# Altium PCB iot_hdmi_mux.PcbDoc
Units mm, origin at the board's own origin, x right, y up, seen from the top; angles counter-clockwise.
Board outline 40 x 50 mm, 4 copper layers (Top Layer, Layer 1, Layer 2, Bottom Layer), stack 1.57 mm thick; 48 components, 62 nets, 245 pads, 284 vias.
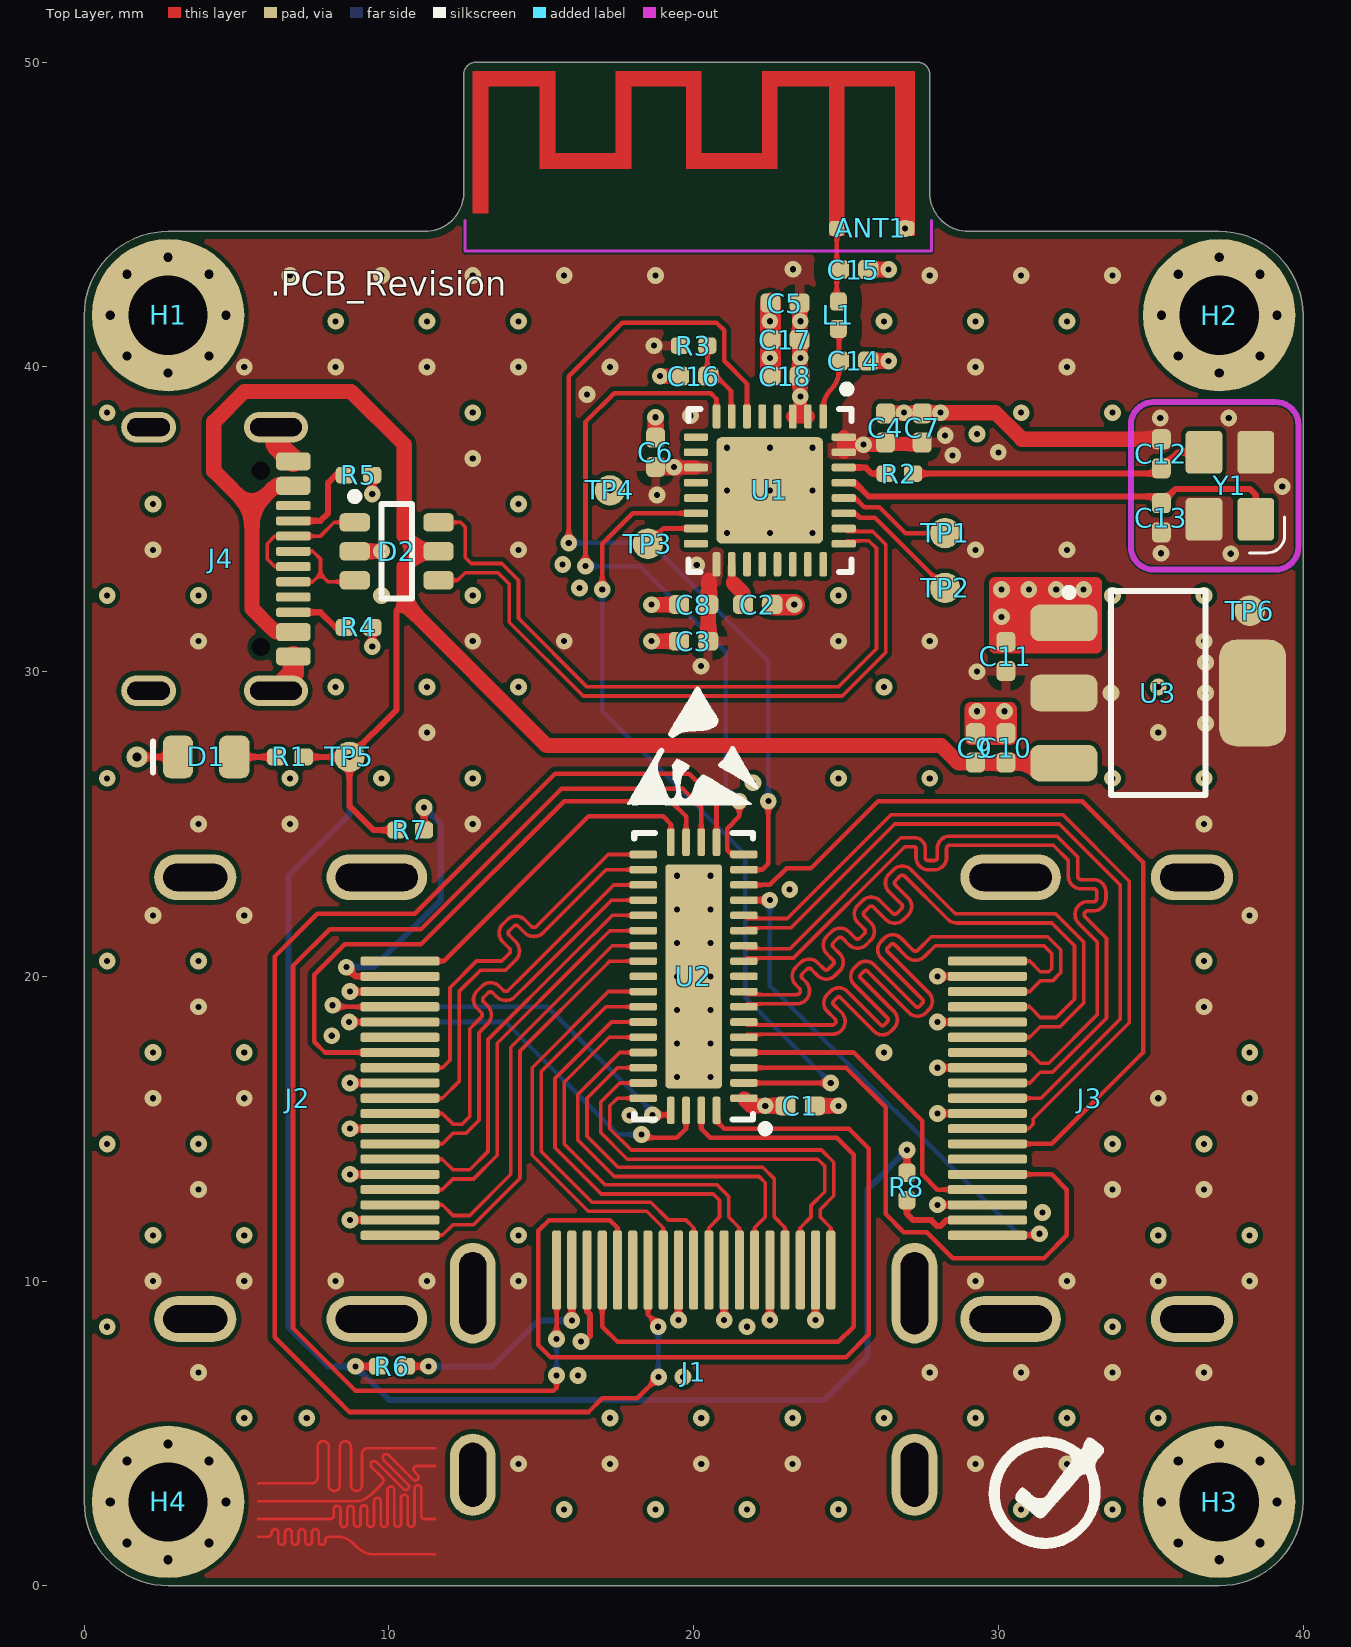
[diagram p0: Top Layer view]
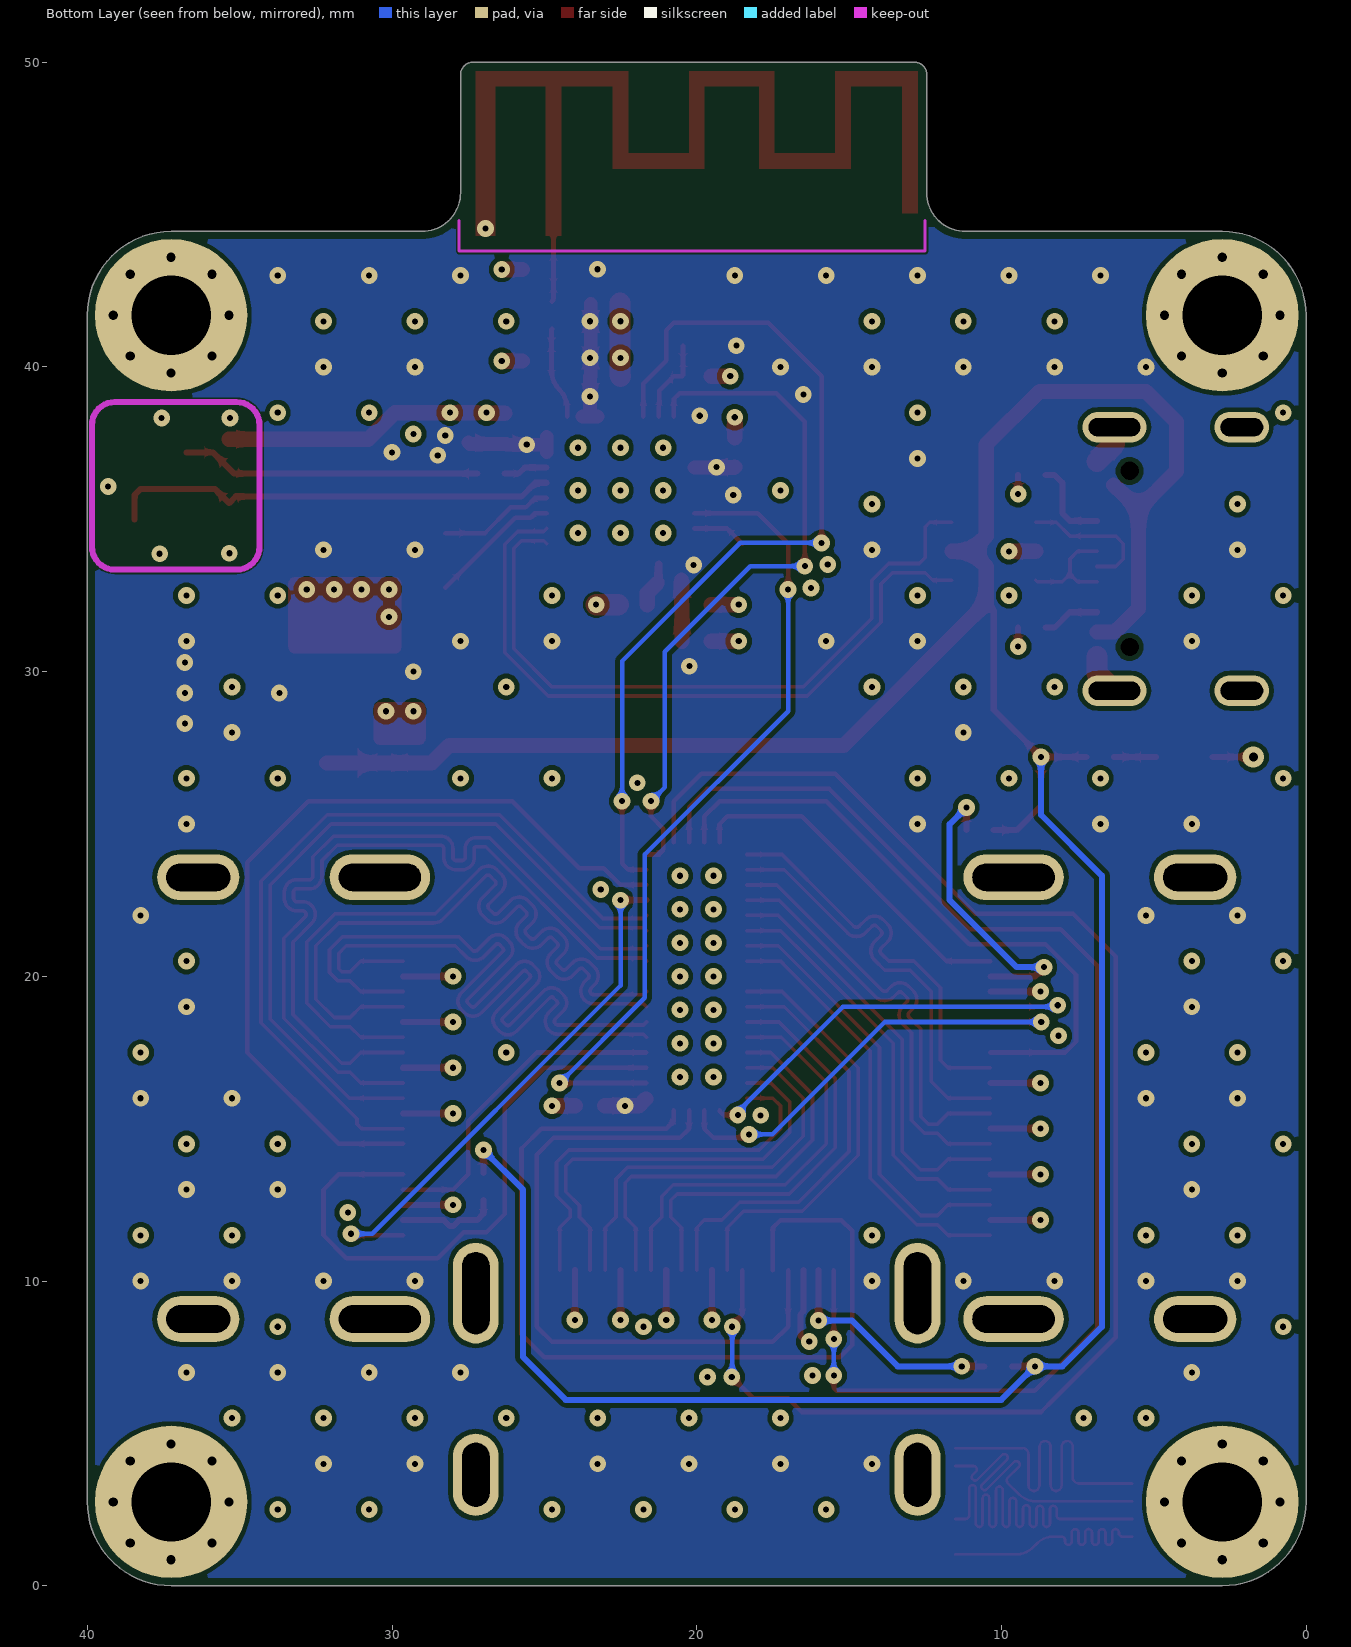
[diagram p1: Bottom Layer view, seen from below]
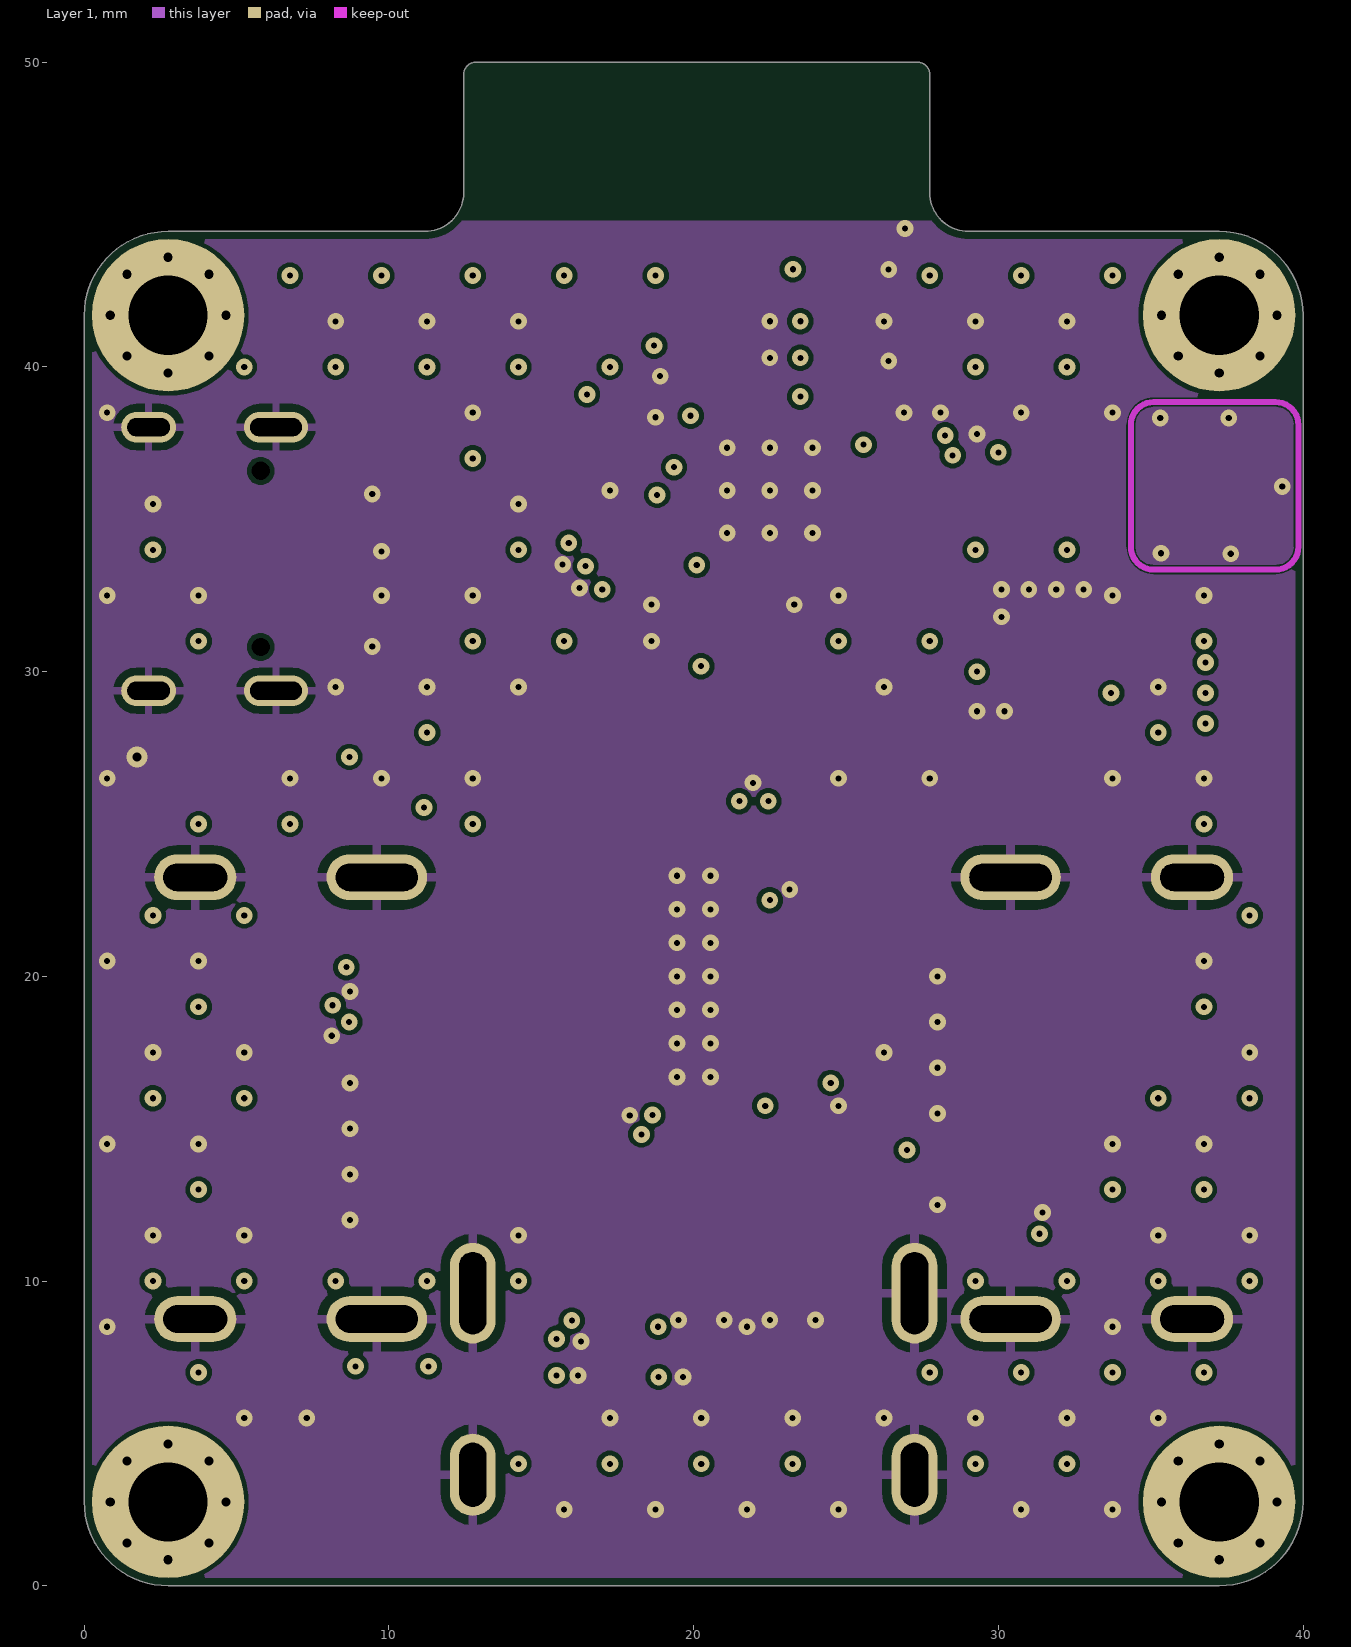
[diagram p2: Layer 1]
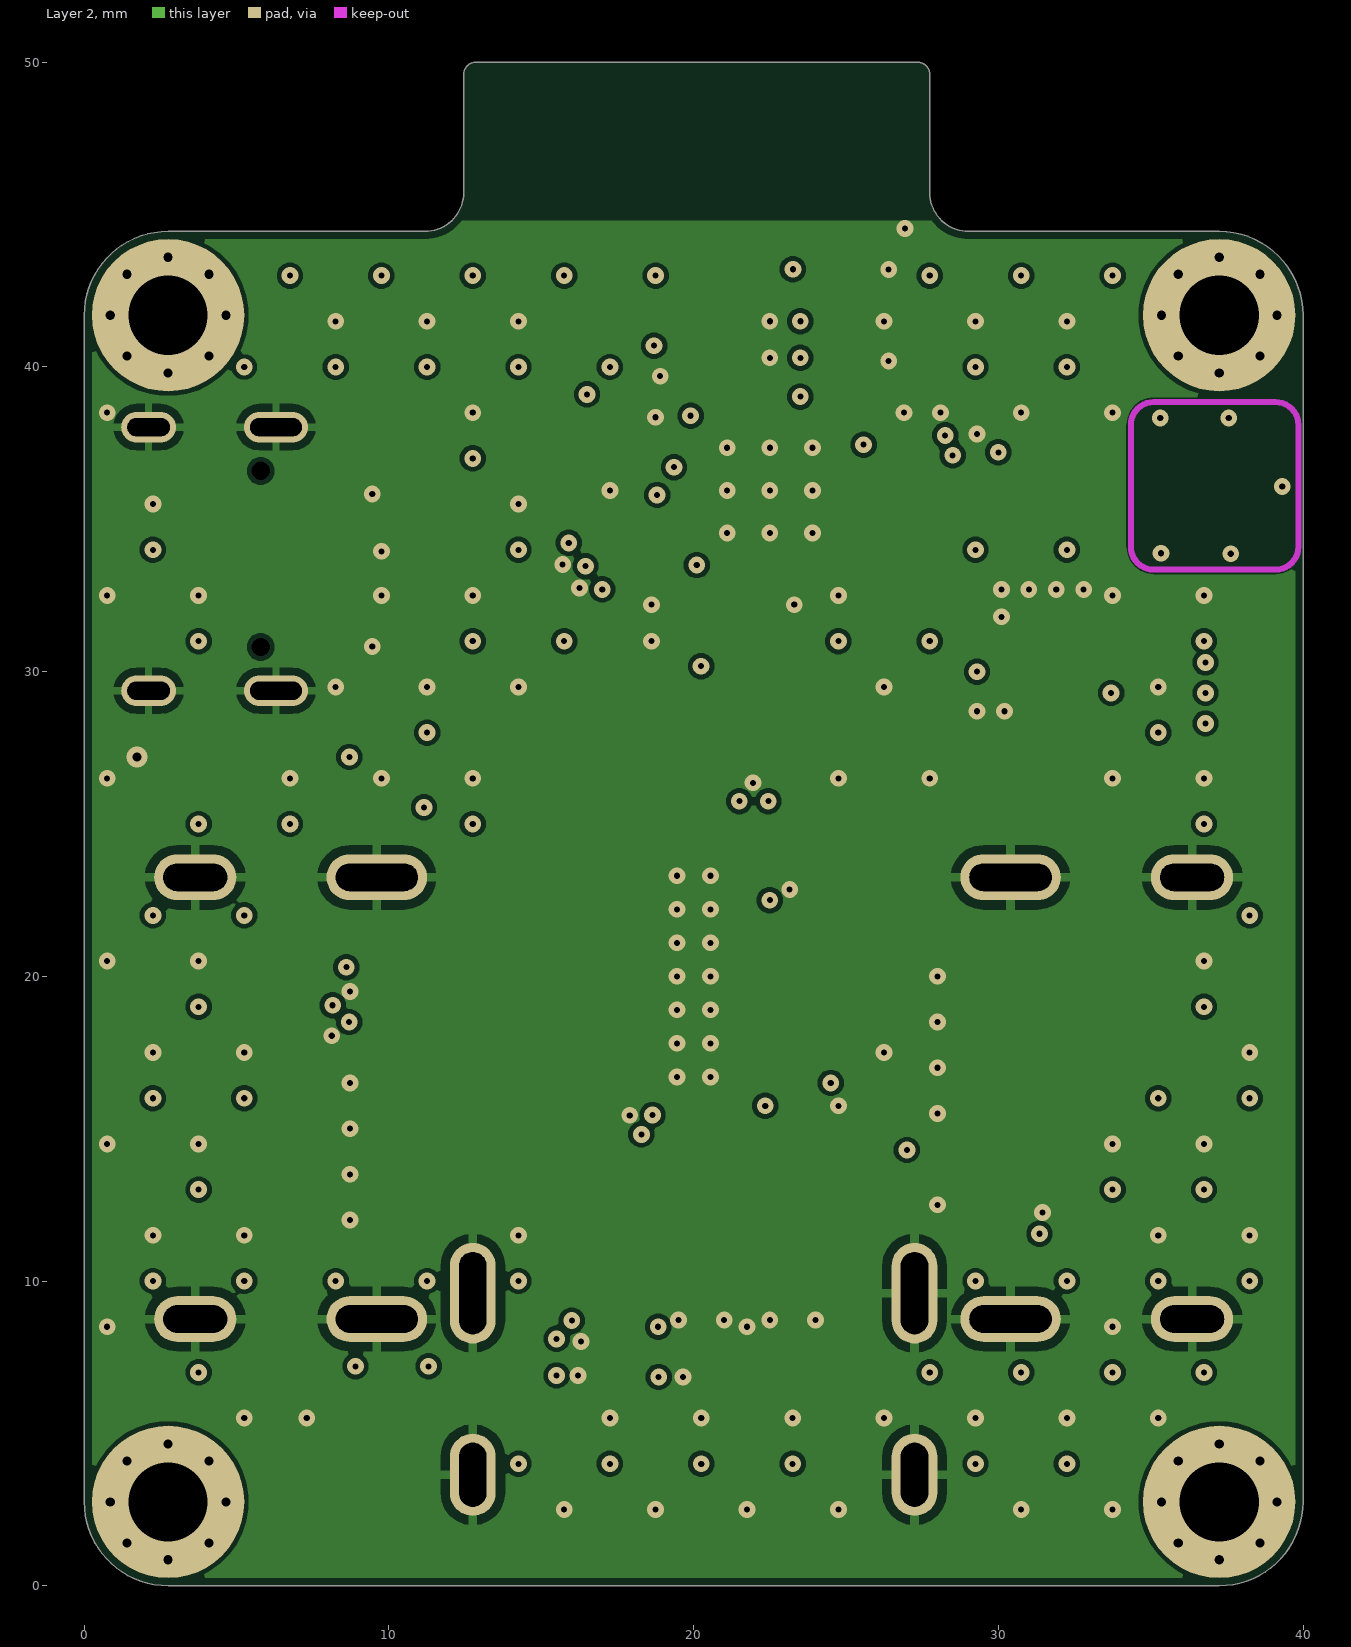
[diagram p3: Layer 2]
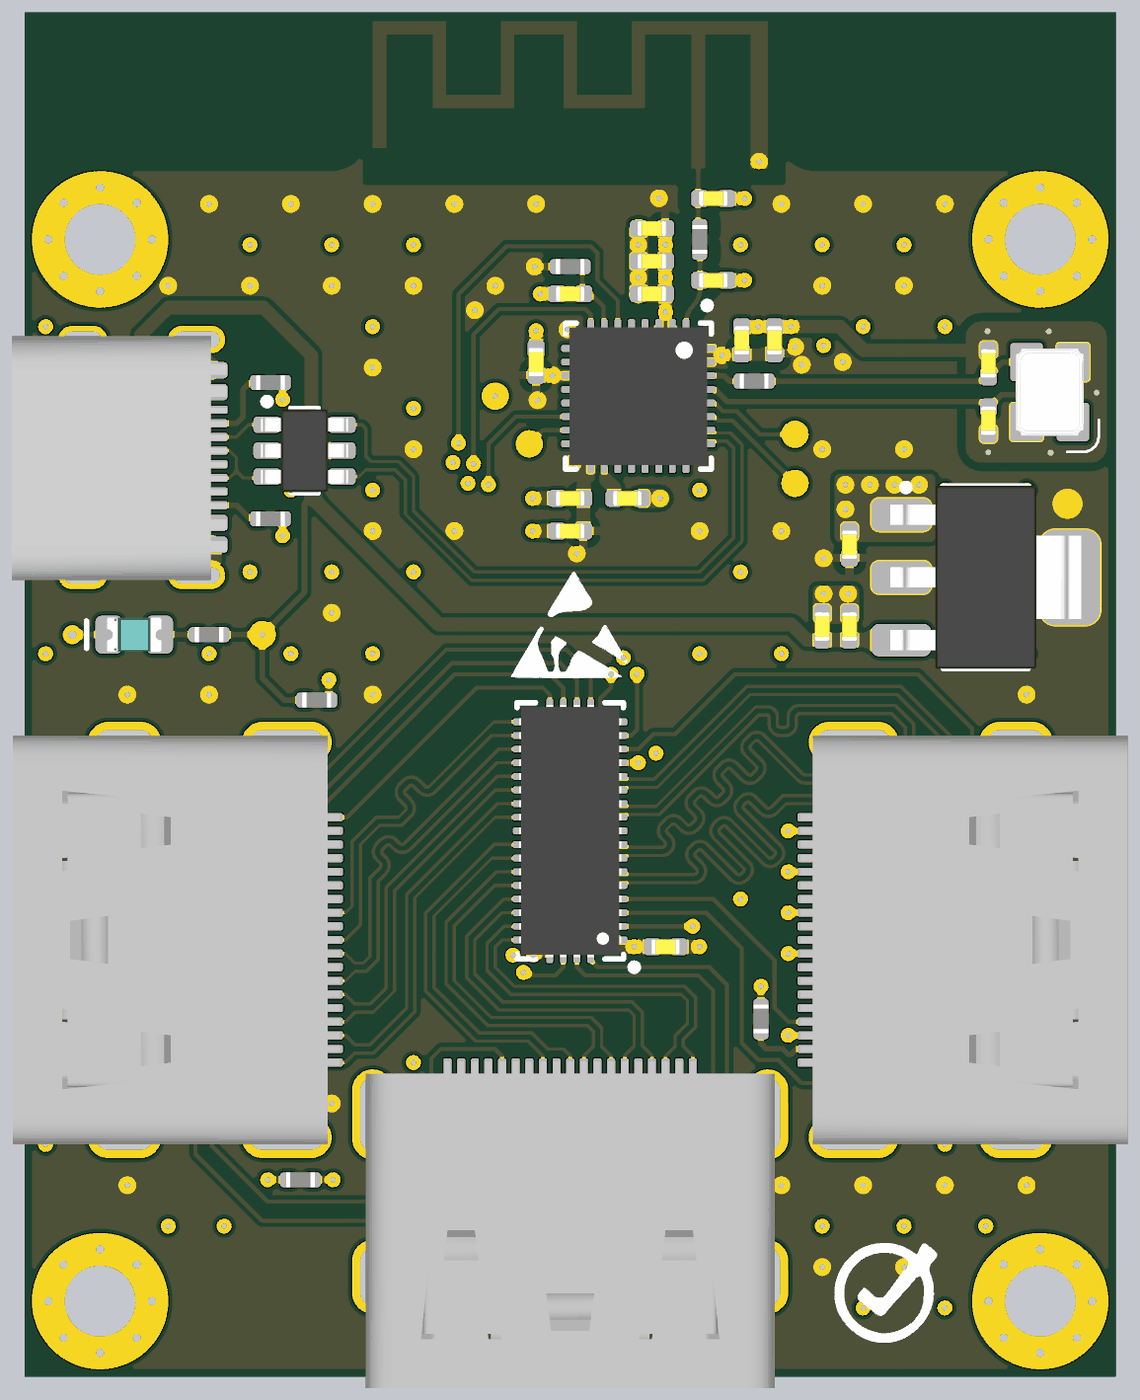
[diagram p4: 3D render of the assembled board from above, using the file's embedded part models]

## Layer stack, top to bottom
Top Solder: solder mask 0.0102, Solder Resist, Dk 3.5
Top Layer: signal copper 0.0356
Dielectric 2: prepreg 0.0994, PP-006, Dk 4.1
Layer 1: signal copper 0.0175
Dielectric 1: dielectric 1.265, FR-4, Dk 4.8
Layer 2: signal copper 0.0175
Dielectric 3: prepreg 0.0994, PP-006, Dk 4.1
Bottom Layer: signal copper 0.0356
Bottom Solder: solder mask 0.0102, Solder Resist, Dk 3.5

## Board outline
0,2.75 ccw(c2.75,2.75) 2.75,0 37.25,0 ccw(c37.25,2.75) 40,2.75 40,41.7 ccw(c37.25,41.7) 37.25,44.45 29.02,44.45 cw(c29.02,45.72) 27.75,45.72 27.75,49.6 ccw(c27.35,49.6) 27.35,50 12.85,50 ccw(c12.85,49.6) 12.45,49.6 12.45,45.72 cw(c11.18,45.72) 11.18,44.45 2.75,44.45 ccw(c2.75,41.7) 0,41.7

## Design rules (kind name [scope] priority, off if disabled: settings)
BoardOutlineClearance [All] p1: gap=0.25 ignorepadtopadclearanceinfootprint=FALSE
Clearance Clearance_2 [IsKeepOut vs IsRegion] p1: gap=0.05 ignorepadtopadclearanceinfootprint=FALSE
Clearance Clearance_1 [InNetClass('RF') vs InPolygon] p2: gap=0.5 ignorepadtopadclearanceinfootprint=FALSE
Clearance [All] p3: gap=0.15 ignorepadtopadclearanceinfootprint=FALSE
DiffPairsRouting [All] p1: maxlimit=0.254 minlimit=0.181 mostfreqgap=0.254 toplayer_maxgap=0.181 toplayer_prefgap=0.181 toplayer_minwidth=0.12 toplayer_maxwidth=0.12 toplayer_prefwidth=0.12 bottomlayer_maxgap=0.181 bottomlayer_prefgap=0.181 bottomlayer_minwidth=0.12 bottomlayer_maxwidth=0.12 bottomlayer_prefwidth=0.12 impedanceprofiledriven=TRUE impedanceprofileid={FBAB892D-14A3-4661-8250-639540554748} impedanceprofilevalue=100.000000 maxuncoupledlength=12.7
HoleSize [All] p1: absolutevalues=TRUE maxlimit=10 minlimit=0.2 maxpercent=80.000 minpercent=20.000
MatchedLengths MatchedLengths_A [InNetClass('HDMI_A')] p1: tolerance=2.5 checknetsindiffpair=FALSE checkdiffpairvsdiffpair=TRUE checkxsignals=TRUE checkothers=TRUE
MatchedLengths MatchedLengths_B [InNetClass('HDMI_B')] p2: tolerance=2.5 checknetsindiffpair=FALSE checkdiffpairvsdiffpair=TRUE checkxsignals=TRUE checkothers=TRUE
MatchedLengths MatchedLengths_C [InNetClass('HDMI_C')] p3: tolerance=2.5 checknetsindiffpair=FALSE checkdiffpairvsdiffpair=TRUE checkxsignals=TRUE checkothers=TRUE
MinimumSolderMaskSliver [All] p1: minsoldermaskwidth=0.1
PolygonConnect PolygonConnect_1 [HasFootprint('C0402') or HasFootprint('C0603') or HasFootprint('R*') or IsThruPin] p1: connectstyle=Relief reliefconductorwidth=0.3 reliefentries=4 polygonreliefangle="90 Angle" airgapwidth=0.3
PolygonConnect [All] p2: connectstyle=Direct reliefconductorwidth=0.254 reliefentries=4 polygonreliefangle="90 Angle" airgapwidth=0.254
RoutingVias [All] p1: holewidth=0.3 width=0.7 viastyle="Through Hole" minholewidth=0.2 minwidth=0.55 maxholewidth=0.3 maxwidth=0.7
SilkToSilkClearance [All] p1: silktosilkclearance=0
SilkToSolderMaskClearance [IsPad] p1: minsilkscreentomaskgap=0.15 clearancetoexposedcopper=TRUE
SolderMaskExpansion SolderMaskExpansion_1 [IsVia] p1: expansion=-0.175 istentingtop=FALSE
SolderMaskExpansion [All] p2: expansion=0.05 istentingtop=FALSE
SupplyNets "Schematic Supply Nets_2" [InNet('GND')] p1: voltage=0.000
SupplyNets "Schematic Supply Nets_1" [InNet('+VBUS')] p2: voltage=0.000
SupplyNets "Schematic Supply Nets" [InNet('+3V3')] p3: voltage=0.000
UnRoutedNet [All] p1: checkbadconnections=TRUE
Width Width_RF [InNetClass('RF')] p1: maxlimit=0.254 minlimit=0.156 preferedwidth=0.254 toplayer_maxwidth=0.17 toplayer_prefwidth=0.17 bottomlayer_maxwidth=0.17 bottomlayer_prefwidth=0.17 impedanceprofiledriven=TRUE impedanceprofileid={8DBEE318-DAAD-4E52-B127-68809F1654DC} impedanceprofilevalue=50.000000 minimp=50.000000 maximp=50.000000 favimp=50.000000
Width [All] p2: maxlimit=1 minlimit=0.12 preferedwidth=0.2
24 further rules are at their usual default settings.

## Classes and differential pairs
net class USB: USB_D_N USB_D_P
net class HDMI_C: CCK_n CCK_p CD0_n CD0_p CD1_n CD1_p CD2_n CD2_p
net class HDMI_B: BCK_n BCK_p BD0_n BD0_p BD1_n BD1_p BD2_n BD2_p
net class HDMI_A: ACK_n ACK_p AD0_n AD0_p AD1_n AD1_p AD2_n AD2_p
net class RF: ANT MCU_ANT
differential pair USB_D: +USB_D_P -USB_D_N
differential pair CD2: +CD2_p -CD2_n
differential pair CD1: +CD1_p -CD1_n
differential pair CD0: +CD0_p -CD0_n
differential pair CCK: +CCK_p -CCK_n
differential pair BD2: +BD2_p -BD2_n
differential pair BD1: +BD1_p -BD1_n
differential pair BD0: +BD0_p -BD0_n
differential pair BCK: +BCK_p -BCK_n
differential pair AD2: +AD2_p -AD2_n
differential pair AD1: +AD1_p -AD1_n
differential pair AD0: +AD0_p -AD0_n
differential pair ACK: +ACK_p -ACK_n

## Components (designator, comment, footprint, x,y, rotation, side; value= is the part's Value field where it differs from the comment)
ANT1 "2.4GHz" ANT_2.4_2 27.75,44.8 r180 top net-tie
C1 "100n" C0402 23.5,15.75 r180 top
C2 "1u" C0402 22.1,32.2 r0 top
C3 "1u" C0402 20,31 r0 top
C4 "10n" C0402 26.3,38 r90 top
C5 "10u" C0402 23,42.1 r0 top
C6 "100n" C0402 18.75,37.2 r90 top
C7 "1u" C0402 27.5,38 r270 top
C8 "100n" C0402 20,32.2 r180 top
C9 "10u" C0402 29.25,27.5 r270 top
C10 "100n" C0402 30.25,27.5 r90 top
C11 "10u" C0402 30.25,30.5 r270 top
C12 "22p" C0402 35.35,37.15 r270 top
C13 "22p" C0402 35.35,35.05 r90 top
C14 "3p3" C0402 25.25,40.2 r0 top
C15 "3p3" C0402 25.25,43.2 r0 top
C16 "100n" C0402 20,39.7 r180 top
C17 "1u" C0402 23,40.9 r0 top
C18 "100n" C0402 23,39.7 r180 top
D1 "green" LED_0805_G 4,27.2 r0 top
D2 "USBLC6-2SC6" USBLC6-2SC6 10.25,33.95 r0 top
H1 "M2.5" M2.5_HOLE 2.75,41.7 r0 top
H2 "M2.5" M2.5_HOLE 37.25,41.7 r0 top
H3 "M2.5" M2.5_HOLE 37.25,2.75 r0 top
H4 "M2.5" M2.5_HOLE 2.75,2.75 r0 top
J1 "1747981-1" 1747981-1 20,7 r0 top locked
J2 "1747981-1" 1747981-1 7,16 r270 top locked
J3 "1747981-1" 1747981-1 33,16 r90 top locked
J4 "USB-C female" TYPE-C-31-M-12 0,33.7 r270 top locked
L1 "2n2" L0402 24.75,41.7 r90 top
R1 "5k1" R0402 6.75,27.2 r0 top
R2 "33R" R0402 26.75,36.5 r0 top
R3 "10k" R0402 20,40.7 r180 top
R4 "5k1" R0402 9,31.45 r180 top
R5 "5k1" R0402 9,36.45 r180 top
R6 "0R" R0402 10.1,7.2 r0 top
R7 "0R" R0402 10.7,24.8 r0 top
R8 "0R" R0402 27,13.1 r270 top
TP1 "Testing_Point_1mm" TestingPoint_1mm 28.25,34.55 r0 top
TP2 "Testing_Point_1mm" TestingPoint_1mm 28.25,32.75 r0 top
TP3 "Testing_Point_1mm" TestingPoint_1mm 18.5,34.2 r0 top
TP4 "Testing_Point_1mm" TestingPoint_1mm 17.25,35.95 r0 top
TP5 "Testing_Point_1mm" TestingPoint_1mm 8.7,27.2 r90 top
TP6 "Testing_Point_1mm" TestingPoint_1mm 38.25,32 r90 top
U1 "ESP32-C3FH4" QFN50P500X500X90_HS-33N 22.5,35.95 r270 top
U2 "TS3DV642" QFN50P350X900X80_HS-43N 20,20 r180 top
U3 "AZ1117CH-3.3TRG1" AZ1117CH-3.3TRG1 35.25,29.3 r0 top
Y1 "40MHz" SMD3225-4P 37.6,36.1 r90 top

## Footprints (in the part's own frame and the unit in brackets; to place one, negate y for a bottom-side part, rotate by r counter-clockwise, add the part's x,y. Pads: shape width x height; smd on the part's side, far side on the other; paste and mask are expansions set on the pad)
1747981-1 [mm] "19P Female HDMI Horizontal attachment 500mA -25℃~+70℃ SMD D-Sub / VGA Connectors ROHS"
  rrect50% 0.3x2.6 smd: 1(4.5,3.36) 2(4,3.36) 3(3.5,3.36) 4(3,3.36) 5(2.5,3.36) 6(2,3.36) 7(1.5,3.36) 8(1,3.36) 9(0.5,3.36) 10(0,3.36) 11(-0.5,3.36) 12(-1,3.36) 13(-1.5,3.36) 14(-2,3.36) 15(-2.5,3.36) 16(-3,3.36) 17(-3.5,3.36) 18(-4,3.36) 19(-4.5,3.36)
  oval 1.5x2.7 hole 0.9 slot 2.1 at 90 deg: M(-7.25,-3.36) M(7.25,-3.36)
  oval 1.5x3.3 hole 0.9 slot 2.7 at 90 deg: M(-7.25,2.6) M(7.25,2.6)
  body extent -7.5,-7.45 7.5,4.55, height 6.1
ANT_2.4_2 [mm] "SWRA117D 2.4GHz antenna design by TI"
  rrect50% 0.5x0.5 smd paste-2539.97 mask+0.102: 1(3.05,0.25)
  rrect50% 0.63x0.5 smd paste-2539.97 mask+0.102: 2(0.815,0.25)
  Top Layer region: 0.5,0.5 0.5,-4.91 5.5,-4.91 5.5,-2.21 7.5,-2.21 7.5,-4.91 10.3,-4.91 10.3,-2.21 12.3,-2.21 12.3,-4.91 15,-4.91 15,-0.24 14.5,-0.24 14.5,-4.41 12.8,-4.41 12.8,-1.71 9.8,-1.71 9.8,-4.41 8,-4.41 8,-1.71 5,-1.71 5,-4.41 3.3,-4.41 3.3,0.5 2.8,0.5 2.8,-4.41 1.13,-4.41 1.13,0.5
AZ1117CH-3.3TRG1 [mm] "SOT223, 4-Leads, Body 6.51x7.00mm (avg), Pitch 2.30mm, IPC Medium Density"
  rrect50% 2.2x1.2 smd: 1(-3.1,2.3) 2(-3.1,0) 3(-3.1,-2.3)
  rrect50% 2.2x3.5 smd: 4(3.1,0)
  silkscreen extent -3.05,-3.35 1.55,3.42, body extent -3.5,-3.35 3.5,3.35, height 1.8
C0402 [mm] "Chip Capacitor, 2-Leads, Body 1.00x0.50mm, IPC Medium Density"
  rrect50% 0.66x0.62 smd mask+0.05: 1(-0.48,0) 2(0.48,0)
  body extent -0.53,-0.28 0.53,0.28, height 0.55
L0402 [mm] "Chip Resistor, 2-Leads, Body 1.00x0.50mm, IPC Medium Density"
  rrect50% 0.6x0.55 smd mask+0.05: 1(-0.45,0) 2(0.45,0)
  body extent -0.53,-0.28 0.53,0.28, height 0.25
LED_0805_G [mm] "Green 0805 LED"
  rrect50% 1x1.4 smd: 1(-0.925,0) 2(0.925,0)
  silkscreen extent -1.75,-0.5 -1.75,0.5, body extent -1,-0.63 1,0.63, height 0.8
M2.5_HOLE [mm]
  round 5 hole 2.6: 1(0,0)
QFN50P350X900X80_HS-43N [mm] "QFN, 42-Leads, Body 3.50x9.00mm, Pitch 0.50mm, Thermal Pad 2.05x7.55mm, IPC Medium Density"
  rrect50% 0.9x0.25 smd: 1(-1.65,4) 2(-1.65,3.5) 3(-1.65,3) 4(-1.65,2.5) 5(-1.65,2) 6(-1.65,1.5) 7(-1.65,1) 8(-1.65,0.5) 9(-1.65,0) 10(-1.65,-0.5) 11(-1.65,-1) 12(-1.65,-1.5) 13(-1.65,-2) 14(-1.65,-2.5) 15(-1.65,-3) 16(-1.65,-3.5) 17(-1.65,-4) 22(1.65,-4) 23(1.65,-3.5) 24(1.65,-3) 25(1.65,-2.5) 26(1.65,-2) 27(1.65,-1.5) 28(1.65,-1) 29(1.65,-0.5) 30(1.65,0) 31(1.65,0.5) 32(1.65,1) 33(1.65,1.5) 34(1.65,2) 35(1.65,2.5) 36(1.65,3) 37(1.65,3.5) 38(1.65,4)
  rrect50% 0.25x0.9 smd: 18(-0.75,-4.4) 19(-0.25,-4.4) 20(0.25,-4.4) 21(0.75,-4.4) 39(0.75,4.4) 40(0.25,4.4) 41(-0.25,4.4) 42(-0.75,4.4)
  rrect10% 1.85x7.35 smd: 43(0,0)
  silkscreen extent -2.48,-4.7 1.95,5.12, body extent -1.88,-4.63 1.88,4.63, height 0.8
QFN50P500X500X90_HS-33N [mm] "QFN, 32-Leads, Body 5.00x5.00mm, Pitch 0.50mm, Thermal Pad 3.70x3.70mm, IPC Medium Density"
  rrect50% 0.8x0.25 smd: 1(-2.425,1.75) 2(-2.425,1.25) 3(-2.425,0.75) 4(-2.425,0.25) 5(-2.425,-0.25) 6(-2.425,-0.75) 7(-2.425,-1.25) 8(-2.425,-1.75) 17(2.425,-1.75) 18(2.425,-1.25) 19(2.425,-0.75) 20(2.425,-0.25) 21(2.425,0.25) 22(2.425,0.75) 23(2.425,1.25) 24(2.425,1.75)
  rrect50% 0.25x0.8 smd: 9(-1.75,-2.425) 10(-1.25,-2.425) 11(-0.75,-2.425) 12(-0.25,-2.425) 13(0.25,-2.425) 14(0.75,-2.425) 15(1.25,-2.425) 16(1.75,-2.425) 25(1.75,2.425) 26(1.25,2.425) 27(0.75,2.425) 28(0.25,2.425) 29(-0.25,2.425) 30(-0.75,2.425) 31(-1.25,2.425) 32(-1.75,2.425)
  rrect10% 3.5x3.5 smd: 33(0,0)
  silkscreen extent -3.45,-2.68 2.68,2.67, body extent -2.53,-2.53 2.53,2.53, height 0.9
R0402 [mm] "Chip Resistor, 2-Leads, Body 1.00x0.50mm, IPC Medium Density"
  rrect50% 0.6x0.55 smd mask+0.05: 1(-0.45,0) 2(0.45,0)
  body extent -0.53,-0.28 0.53,0.28, height 0.25
SMD3225-4P [mm] "Crystal footprint"
  rrect20% 1.4x1.2 smd: 1(-1.1,-0.85) 2(1.1,-0.85) 3(1.1,0.85) 4(-1.1,0.85)
  silkscreen extent -2.2,-1.8 -1.02,-0.64, body extent -1.6,-1.25 1.6,1.25, height 0.55
TestingPoint_1mm [mm]
  round 1 smd paste-1: 1(0,0)
TYPE-C-31-M-12 [mm] "5A 1 16P Female Type-C SMD  USB Connectors ROHS"
  rrect50% 0.6x1.14 smd: A1B12(-3.2,6.86) A4B9(-2.4,6.86) B1A12(3.2,6.86) B4A9(2.4,6.86)
  rrect50% 0.3x1.14 smd: A5(-1.25,6.86) A6(-0.25,6.86) A7(0.25,6.86) A8(1.25,6.86) B5(1.75,6.86) B6(0.75,6.86) B7(-0.75,6.86) B8(-1.75,6.86)
  rrect50% 0x0 hole 0.6: H(-2.89,5.79) H(2.89,5.79)
  oval 1x2.1 hole 0.6 slot 1.7 at 90 deg: M1(-4.325,6.29) M1(4.325,6.29)
  oval 1x1.8 hole 0.6 slot 1.4 at 90 deg: M1(-4.325,2.11) M1(4.325,2.11)
  body extent -4.45,-0.49 4.49,7.41, height 3.21
USBLC6-2SC6 [mm]
  rrect50% 1x0.6 smd: 1(-1.375,0.95) 2(-1.375,0) 3(-1.375,-0.95) 4(1.375,-0.95) 5(1.375,0) 6(1.375,0.95)
  silkscreen extent -1.5,-1.55 0.5,1.92, body extent -1.6,-1.53 1.6,1.53, height 1.45

## Part data
ANT1: library part ANT_2.4, "SWRA117D 2.4GHz antenna design by TI"
C1 C6 C8 C10 C16 C18: library part C_0402, "0402 cap", LCSC=C307331
C2 C3 C7 C17: library part C_0402, "0402 cap", LCSC=C52923
C4: library part C_0402, "0402 cap", LCSC=C15195
C5 C9 C11: library part C_0402, "0402 cap", LCSC=C15525
C12 C13: library part C_0402, "0402 cap", LCSC=C1555
C14 C15: library part C_0402, "0402 cap", LCSC=C1565
D1: library part LED_0805_G, "0805 green LED", LCSC=C2297
D2: "Trans Voltage Suppressor Diode, 5V V(RWM), Unidirectional, 1 Element, Silicon", Clamping Voltage-Max=17V, LCSC=C2827654, Manufacturer=STMicroelectronics, Max Operating Temperature=125°C, Min Breakdown Voltage=6V, Min Operating Temperature=-40°C, Package Body Material=Plastic, Package Shape=Rectangular, Package Style="SMALL OUTLINEMeter", Peak Reflow Temperature (Cel)=260°C, Rep Pk Reverse Voltage-Max=5V, Supplier Part Number 1=511-USBLC6-2SC6, Additional Feature="HIGH RELIABILITY", Category="TVS Diodes", ComponentLink1Description=https://datasheet.ciiva.com:443/pdfs/VipMasterIC/IC/SGST/SGSTS30336/SGSTS30336-1.pdf?src-supplier=IHS+Markit, ComponentLink1URL=https://datasheet.ciiva.com:443/pdfs/VipMasterIC/IC/SGST/SGSTS30336/SGSTS30336-1.pdf?src-supplier=IHS+Markit, ComponentLink2Description=https://datasheet.ciiva.com/1268/1690354-1268384.pdf?src-supplier=Element14, ComponentLink2URL=https://datasheet.ciiva.com/1268/1690354-1268384.pdf?src-supplier=Element14, ComponentLink3Description=https://datasheet.ciiva.com/4508/cd00050750-113117-4508433.pdf?src-supplier=Mouser, ComponentLink3URL=https://datasheet.ciiva.com/4508/cd00050750-113117-4508433.pdf?src-supplier=Mouser, ComponentLink4Description=https://datasheet.ciiva.com/15143/getdatasheetpartid-148465-15143789.pdf?src-supplier=Verical, ComponentLink4URL=https://datasheet.ciiva.com/15143/getdatasheetpartid-148465-15143789.pdf?src-supplier=Verical, ComponentLink5Description=https://datasheet.ciiva.com/16200/cd00050750-16200026.pdf?src-supplier=Future+Electronics, ComponentLink5URL=https://datasheet.ciiva.com/16200/cd00050750-16200026.pdf?src-supplier=Future+Electronics, ComponentLink6Description=https://datasheet.ciiva.com/41444/001184109-da-01-en-ic-esd-protecti-usblc6-2sc6-sot-23-6-stm-41444156.pdf?src-supplier=Conrad, ComponentLink6URL=https://datasheet.ciiva.com/41444/001184109-da-01-en-ic-esd-protecti-usblc6-2sc6-sot-23-6-stm-41444156.pdf?src-supplier=Conrad, Diode Element Material=SILICON, Diode Type="TRANS VOLTAGE SUPPRESSOR", JESD-30 Code=R-PDSO-G6, JESD-609 Code=e3, Manufacturer Part Number=USBLC6-2SC6, Moisture Sensitivity Level=1, Number of Elements=1, Pins=6, Polarity=Unidirectional, Pricing 1="1=0.61, 10=0.522, 50=0.522, 100=0.375, 1000=0.258, 10000=0.204 (USD)", Qualification Status="Not Qualified", Reach SVHC Compliant=Yes, Reference Standard=IEC-61000-4-2, RoHS=Yes, RoHS Compliant=Yes, Stock 1=162692, Supplier 1=Mouser, Surface Mount=Yes, Technology=AVALANCHE, Terminal Finish=Tin, Terminal Form="Gull Wing", Terminal Position=DUAL
H1 H2 H3 H4: library part M2.5_HOLE, "M2.5 hole with connection"
J1 J2 J3: "HDMI (High-Definition Multimedia Interface) Connector; No Flange; Through hole", LCSC=C428484, Manufacturer="AMP - TE CONNECTIVITY", Supplier Part Number=70084303, ComponentLink1Description=http://www.farnell.com/datasheets/596170.pdf?src-supplier=Farnell, ComponentLink1URL=http://www.farnell.com/datasheets/596170.pdf?src-supplier=Farnell, ComponentLink2Description=https://www.te.com/commerce/DocumentDelivery/DDEController?Action=srchrtrv&DocNm=1747981&DocType=Customer+Drawing&DocLang=English&src-supplier=Digikey, ComponentLink2URL=https://www.te.com/commerce/DocumentDelivery/DDEController?Action=srchrtrv&DocNm=1747981&DocType=Customer+Drawing&DocLang=English&src-supplier=Digikey, ComponentLink3Description=http://www.farnell.com/datasheets/596170.pdf?src-supplier=Newark, ComponentLink3URL=http://www.farnell.com/datasheets/596170.pdf?src-supplier=Newark, Manufacturer Part Number=1747981-1, RoHS=No, Supplier="Allied Electronics"
J4: library part TYPE-C-31-M-12, "Conn USB Type C PL 22 POS 0.5mm Solder ST SMD 22 Terminal 1Port Emboss T/R", LCSC=C165948, Manufacturer="HRO Electronics", Category=Uncategorized, Manufacturer Part Number=TYPE-C-31-M-12, Pricing 1="5=0.1612, 50=0.1282, 150=0.112, 1000=0.0977, 2000=0.0937, 5000=0.0913 (USD)", RoHS=No, Stock 1=6920, Supplier 1=LCSC, Supplier Part Number 1=C165948
L1: library part L_0402, "0402 inductor", LCSC=C86061
R1 R4 R5: library part R_0402, "0402 62.5mW", LCSC=C25905
R2: library part R_0402, "0402 62.5mW", LCSC=C25105
R3: library part R_0402, "0402 62.5mW", LCSC=C25744
R6 R7 R8: library part R_0402, "0402 62.5mW", LCSC=C17168
TP1 TP2 TP3 TP4 TP5 TP6: "1mm testing point"
U1: "RF System on a Chip - SoC SMD IC ESP32-C3FH4, single-core MCU, 2.4G Wi-Fi & BLE 5.0 combo, QFN 32-pin, 5*5 mm, 4 MB flash inside, -40 C - +105 C", LCSC=C2858491, Manufacturer="Espressif Systems", Supplier Part Number=356-ESP32-C3FH4, Category=LDO, Manufacturer Part Number=ESP32-C3FH4, Pricing="1=1.3, 10=1.3, 50=1.3, 100=1.3, 1000=1.3, 10000=1.3 (USD)", RoHS=No, Stock=8425, Supplier=Mouser
U2: "6-Gbps 12-channel differential 1-to-2 and 2-to-1 mux for DVI 1.0/ DisplayPort 1.4 /HDMI 2.0", Case/Package=HVQCCN, LCSC=C157482, Manufacturer="Texas Instruments", Manufacturer Part Number=TS3DV642A0RUAR, Max Operating Temperature=85°C, Max Supply Voltage=4.5V, Min Operating Temperature=-40°C, Min Supply Voltage=2.6V, Package Body Material=Plastic, Package Shape=Rectangular, Package Style="CHIP CARRIER, HEAT SINK/SLUG, VERY THIN PROFILEMeter", Peak Reflow Temperature (Cel)=260°C, Supplier Part Number=595-TS3DV642A0RUAR, Temperature Grade=INDUSTRIAL, Category="Decoders and Multiplexers", Channels=1, ComponentLink1Description=https://www.ti.com:443/lit/ds/symlink/ts3dv642.pdf?src-supplier=IHS+Markit, ComponentLink1URL=https://www.ti.com:443/lit/ds/symlink/ts3dv642.pdf?src-supplier=IHS+Markit, ComponentLink2Description=https://datasheet.ciiva.com/30004/ts3dv642-30004934.pdf?src-supplier=Avnet, ComponentLink2URL=https://datasheet.ciiva.com/30004/ts3dv642-30004934.pdf?src-supplier=Avnet, ComponentLink3Description=https://datasheet.ciiva.com/18576/ts3dv642-18576654.pdf?src-supplier=Digikey, ComponentLink3URL=https://datasheet.ciiva.com/18576/ts3dv642-18576654.pdf?src-supplier=Digikey, Consumer IC Type="CONSUMER CIRCUIT", Height - Seated (Max)=0.8mm, JESD-609 Code=e4, Length=9mm, Moisture Sensitivity Level=3, Pins=42, Pricing="1=1.49, 10=0.988, 50=0.988, 100=0.878, 1000=0.767, 10000=0.725 (USD)", Reach SVHC Compliant=Yes, RoHS=Yes, RoHS Compliant=Yes, Stock=5076, Supplier=Mouser, Surface Mount=Yes, Terminal Finish=Nickel, Terminal Form="No Lead", Terminal Pitch=0.5mm, Terminal Position=QUAD, Width=3.5mm
U3: "Fixed Positive LDO Regulator, 3.3V, 1.3V Dropout, BIPolar, PDSO3", Case/Package=SOP, Dropout Voltage1-Max=1.3V, Dropout Voltage1-Nom=1.2V, Input Voltage Absolute-Max=18V, LCSC=C92102, Manufacturer=Diodes, Max Supply Voltage=15V, Operating Temperature, TJ-Max=125°C, Operating Temperature, TJ-Min=-20°C, Output Current1-Max=800mA, Output Voltage1-Max=3.365V, Output Voltage1-Min=3.235V, Output Voltage1-Nom=3.3V, Package Body Material=Plastic, Package Shape=Rectangular, Package Style="SMALL OUTLINEMeter", Supplier Part Number 1=6047233, Voltage Tolerance-Max=1.97%, Adjustability=FIXED, Category="Voltage Regulators - Linear", Channels=1, ComponentLink1Description=https://datasheet.ciiva.com:443/pdfs/VipMasterIC/IC/DIOD/DIOD-S-A0007713706/DIOD-S-A0007713706-1.pdf?src-supplier=IHS+Markit, ComponentLink1URL=https://datasheet.ciiva.com:443/pdfs/VipMasterIC/IC/DIOD/DIOD-S-A0007713706/DIOD-S-A0007713706-1.pdf?src-supplier=IHS+Markit, ComponentLink2Description=https://datasheet.ciiva.com/29569/az1117c-29569914.pdf?src-supplier=Digi-Key, ComponentLink2URL=https://datasheet.ciiva.com/29569/az1117c-29569914.pdf?src-supplier=Digi-Key, ComponentLink3Description=https://datasheet.ciiva.com/29569/az1117c-29569915.pdf?src-supplier=Digi-Key, ComponentLink3URL=https://datasheet.ciiva.com/29569/az1117c-29569915.pdf?src-supplier=Digi-Key, ComponentLink4Description=https://datasheet.ciiva.com/29569/az1117c-29569913.pdf?src-supplier=Digi-Key, ComponentLink4URL=https://datasheet.ciiva.com/29569/az1117c-29569913.pdf?src-supplier=Digi-Key, Height - Seated (Max)=1.8mm, JESD-30 Code=R-PDSO-G3, JESD-609 Code=e3, Length=6.5mm, Line Regulation-Max=0.01%, Load Regulation-Max=0.015%, Manufacturer Part Number=AZ1117CH-3.3TRG1, Moisture Sensitivity Level=1, Number of Outputs=1, Packaging="Tape and Reel", Pins=3, Pricing 1="4000=0.0702, 16000=0.0672, 40000=0.0653, 100000=0.0634, 160000=0.0607 (USD)", Qualification Status="Not Qualified", Reach SVHC Compliant=Yes, Regulator Type="FIXED POSITIVE SINGLE OUTPUT LDO REGULATOR", RoHS=Yes, RoHS Compliant=Yes, Stock 1=820000, Supplier 1="Future Electronics", Surface Mount=Yes, Technology=BIPOLAR, Terminal Finish=Tin, Terminal Form="Gull Wing", Terminal Pitch=2.3mm, Terminal Position=DUAL, Width=3.5mm
Y1: library part X322540MPB4SI, "40MHz Surface Mount Crystal 15pF ±10ppm ±20ppm SMD3225-4P Crystals ROHS", LCSC=C9010

## Via types
v1: diameter 0.55, hole 0.2, Top Layer to Bottom Layer, 228 vias
v2: diameter 0.7, hole 0.3, Top Layer to Bottom Layer, 33 vias
v3: diameter 0.55, hole 0.2, Top Layer to Bottom Layer, tented bottom, 23 vias

## Nets (pads, with @x,y where several pads share a name; then routed paths per layer and width w, separated by ;. In a path a pad name is that pad's centre, name@x,y a point inside that pad or via, vN(x,y) a via of type N, cw(c..) or ccw(c..) an arc to the next point about the centre after c; other vN are vias at no path point)
+3V3: C1.2 C3.2 C4.1 C5.2 C6.1 C7.2 C8.1 C11.2 C17.2 C18.1 R3.2 TP6.1 U1.2 U1.3 U1.11 U1.17 U1.31 U1.32 U2.1 U3.2 U3.4 | length 12.1
  Top Layer w0.45: v1@19.521,36.7 U1.11 ; U2.1 U2.1@21.675,15.975 ; U1.3 23.5,38.375 ; C5.2@23.48,42.08 C18.1 23.5,39.68 v1(23.5,39.027) 23.5,38.375 ; U1.2 23.5,38.375 ; U1.31 24.925,37.45 ; U1.32 24.925,37.45 ; C7.2 27.45,37.47 26.797,37.47 26.796,37.468 26.794,37.47 26.25,37.47 26.23,37.45 v1(25.577,37.45) 24.925,37.45
  Top Layer w0.5: C6.1 18.77,36.7 v1@19.521,36.7 ; C3.2 20.48,31.73 C8.1 20.5,32.22 20.5,33 ; U2.1@21.675,15.975 21.9,15.75 C1.2
  other v1: 14.25,4 17.25,4 20.25,4 23.25,4 29.25,4 32.25,4 3.75,7 27.75,7 30.75,7 33.75,7 36.75,7 2.25,10 5.25,10 8.25,10 11.25,10 14.25,10 29.25,10 32.25,10 35.25,10 38.25,10 3.75,13 33.75,13 36.75,13 22.35,15.75 2.25,16 5.25,16 35.25,16 38.25,16 3.75,19 36.75,19 2.25,22 5.25,22 38.25,22 3.75,25 6.75,25 12.75,25 36.75,25 11.25,28 35.25,28 36.8,28.3 33.7,29.3 36.8,29.3 29.3,30 20.243,30.179 36.8,30.3 3.75,31 12.75,31 15.75,31 24.75,31 27.75,31 36.75,31 20.1,33.5 2.25,34 14.25,34 29.25,34 32.25,34 18.8,35.8 19.354,36.711 12.75,37 28.5,37.1 30,37.2 28.255,37.755 19.9,38.4 16.5,39.1 5.25,40 8.25,40 11.25,40 14.25,40 17.25,40 29.25,40 32.25,40 23.5,40.3 18.7,40.7 23.5,41.5 6.75,43 9.75,43 12.75,43 15.75,43 18.75,43 27.75,43 30.75,43 33.75,43 23.258,43.207
+VBUS: C9.2 C10.1 D2.5 J4.A4B9 J4.B4A9 R1.2 R6.1 R7.1 R8.1 TP5.1 U3.3 | length 106.6
  Top Layer w0.2: R1.2 v1(8.7,27.2) ; v1(8.9,7.2) R6.1 ; R7.1 9.5,24.8 8.7,25.6 v1(8.7,27.2) ; 10.5,32.25 10.25,32 10.25,28.75 v1(8.7,27.2) ; R8.1 v1(27,14.3)
  Top Layer w0.5: J4.A4B9@6.32,36.13 6.19,36 6.168,36 5.5,35.332 ; J4.B4A9 6.29,31.3 6.19,31.4 6.168,31.4 5.5,32.068 5.5,35.332 ; D2.5 11,33.95 ; C9.2@29.231,27.001 28.699,27.001 28.125,27.575 15.175,27.575 10.5,32.25 10.5,33.45 11,33.95 ; C9.2@29.25,27 U3.3 ; 5.5,35.332 4.25,36.582 4.25,38.2 5.25,39.2 8.75,39.2 10.5,37.45 10.5,34.45 11,33.95
  Bottom Layer w0.2: v1(8.7,27.2) 8.7,25.3 6.7,23.3 6.7,8.5 8,7.2 v1(8.9,7.2) 10,6.1 24.3,6.1 25.7,7.5 25.7,13 v1(27,14.3)
ACEC: J1.13 U2.18 | length 49
  Top Layer w0.15: J1.13 18.5,8.9 18.868,8.532 v1(18.835,8.5) ; v1(18.85,6.85) 18.15,6.15 17,6.15 16.55,5.7 8.7,5.7 8.25,6.15 6.25,8.15 6.25,20.65 7.65,22.05 10.85,22.05 15.45,26.65 19.85,26.65 20.75,25.75 U2.18
  Bottom Layer w0.15: v1(18.835,8.5) 18.835,6.865 v1(18.85,6.85)
ACK_n: J1.12 U2.31 | length 14.2
  Top Layer w0.12: U2.31 17.2,19.5 14.699,16.999 14.699,14.125 16.537,12.287 18.463,12.287 19,11.75 J1.12
ACK_p: J1.10 U2.32 | length 14.3
  Top Layer w0.12: U2.32 17.126,19 15,16.874 15,14.25 16.662,12.588 18.588,12.588 19.176,12 19.75,12 20,11.75 20,11.176 J1.10
AD0_n: J1.3 U2.37 | length 14.2
  Top Layer w0.12: U2.37 17.574,16.5 16.949,15.875 16.949,14.875 17.824,14 24.074,14 24.3,13.774 24.3,12.926 23.849,12.475 23.849,12.099 23.5,11.75 J1.3
AD0_p: J1.1 U2.38 | length 13.6
  Top Layer w0.12: U2.38 17.5,16 17.25,15.75 17.25,15 17.949,14.301 24.199,14.301 24.601,13.899 24.601,12.801 24.151,12.351 24.151,12.099 24.5,11.75 J1.1
AD1_n: J1.6 U2.35 | length 14
  Top Layer w0.12: U2.35 17.574,17.5 16.199,16.125 16.199,14.625 17.395,13.429 22.145,13.429 22.349,13.225 22.349,12.099 22,11.75 J1.6
AD1_p: J1.4 U2.36 | length 13.4
  Top Layer w0.12: U2.36 17.5,17 16.5,16 16.5,14.75 17.52,13.73 22.27,13.73 22.651,13.349 22.651,12.099 23,11.75 J1.4
AD2_n: J1.9 U2.33 | length 14.5
  Top Layer w0.12: U2.33 17.3,18.5 15.449,16.649 15.449,14.375 16.966,12.858 20.642,12.858 20.849,12.651 20.849,12.099 20.5,11.75 J1.9
AD2_p: J1.7 U2.34 | length 13.9
  Top Layer w0.12: U2.34 17.226,18 15.75,16.524 15.75,14.5 17.091,13.159 20.767,13.159 21.151,12.775 21.151,12.099 21.5,11.75 J1.7
AHPD: J1.19 U2.19 | length 42.5
  Top Layer w0.15: v1(15.5,6.9) 15.5,6.5 15.4,6.4 8.9,6.4 6.85,8.45 6.85,20.35 8.05,21.55 11.05,21.55 15.65,26.15 19.65,26.15 20.25,25.55 U2.19 ; v1(15.5,8.1) 15.5,8.8 J1.19
  Bottom Layer w0.15: v1(15.5,6.9) v1(15.5,8.1)
ANT: ANT1.1 C15.1 L1.2 | length 2.4
  Top Layer w0.156: ANT1.1 24.7,42.271 ccw(c24.871,42.271) L1.2
ASCL: J1.15 U2.42 | length 31.1
  Top Layer w0.15: J1.15 17.5,11.75 17.25,12 15.25,12 14.9,11.65 14.9,7.9 15.3,7.5 25,7.5 25.75,8.25 25.75,14.35 25.1,15 21.312,15 21,15 20.75,15.25 U2.42
ASDA: J1.16 U2.41 | length 22.1
  Top Layer w0.15: J1.16 17,8.5 17.5,8 24.75,8 25.25,8.5 25.25,14.15 24.7,14.7 21.45,14.7 20.55,14.7 20.25,15 U2.41
BCEC: J2.13 U2.20 | length 20.8
  Top Layer w0.15: J2.13 7.9,17.5 7.55,17.85 7.55,20.05 8.55,21.05 11.05,21.05 15.75,25.75 19.25,25.75 19.75,25.25 U2.20
BCK_n: J2.12 U2.22 | length 13.5
  Top Layer w0.12: J2.12 11.75,17 11.753,16.997 12,17.244 12,19.626 12.875,20.501 13.399,20.501 13.701,20.501 13.949,20.749 ccw(c13.864,20.834) 13.949,20.919 13.732,21.136 cw(c14.019,21.423) 13.732,21.71 13.88,21.858 cw(c14.167,21.571) 14.454,21.858 14.672,21.641 ccw(c14.756,21.726) 14.841,21.641 15.5,22.3 17.2,24 U2.22
BCK_p: J2.10 U2.23 | length 14
  Top Layer w0.12: J2.10 11.75,16 12.301,16.551 12.301,19.501 13,20.2 13.7,20.2 13.826,20.2 14.162,20.536 ccw(c13.864,20.834) 14.162,21.131 13.945,21.349 cw(c14.019,21.423) 13.945,21.497 14.093,21.645 cw(c14.167,21.571) 14.242,21.645 14.458,21.429 ccw(c14.756,21.726) 15.054,21.428 15.713,22.087 17.126,23.5 U2.23
BD0_n: J2.3 U2.28 | length 14.2
  Top Layer w0.12: J2.3 11.75,12.5 12.099,12.151 12.651,12.151 14,13.5 14,17.676 16.75,20.426 17.324,21 U2.28
BD0_p: J2.1 U2.29 | length 14.2
  Top Layer w0.12: J2.1 11.75,11.5 12.099,11.849 12.775,11.849 14.301,13.375 14.301,17.551 17.051,20.301 17.25,20.5 U2.29
BD1_n: J2.6 U2.26 | length 13.7
  Top Layer w0.12: J2.6 11.75,14 12.099,13.651 12.651,13.651 13.25,14.25 13.25,17.926 16,20.676 17.324,22 U2.26
BD1_p: J2.4 U2.27 | length 13.7
  Top Layer w0.12: J2.4 11.75,13 12.099,13.349 12.775,13.349 13.551,14.125 13.551,17.801 16.301,20.551 17.25,21.5 U2.27
BD2_n: J2.9 U2.24 | length 14
  Top Layer w0.12: J2.9 11.75,15.5 12.099,15.151 12.401,15.151 12.651,15.401 12.651,18.276 12.874,18.5 13.023,18.649 ccw(c12.938,18.734) 13.023,18.819 12.893,18.949 cw(c13.18,19.236) 12.893,19.523 13.041,19.671 cw(c13.329,19.384) 13.616,19.671 13.746,19.541 ccw(c13.831,19.626) 13.916,19.541 14.437,20.063 17.374,23 U2.24
BD2_p: J2.7 U2.25 | length 14
  Top Layer w0.12: J2.7 11.75,14.5 12.099,14.849 12.525,14.849 12.952,15.276 12.952,15.702 12.952,18.152 13.087,18.287 13.236,18.436 ccw(c12.938,18.734) 13.236,19.031 13.106,19.162 cw(c13.18,19.236) 13.106,19.31 13.254,19.459 cw(c13.329,19.384) 13.403,19.459 13.532,19.329 ccw(c13.831,19.626) 14.128,19.328 14.65,19.85 17.3,22.5 U2.25
BHPD: J2.19 U2.21 | length 11.6
  Top Layer w0.15: J2.19 11.8,20.5 16.55,25.25 19,25.25 19.25,25 U2.21
BOOT: TP3.1 U1.15 | length 1.8
  Top Layer w0.15: TP3.1 19,34.7 U1.15
BSCL: J2.15 U2.40 | length 15.1
  Top Layer w0.15: v1(8.692,18.5) 8.746,18.554 8.8,18.5 J2.15 ; v1(18.285,14.812) 18.397,14.7 19.45,14.7 19.75,15 U2.40
  Bottom Layer w0.15: v1(8.692,18.5) 13.824,18.5 17.512,14.812 v1(18.285,14.812)
BSDA: J2.16 U2.39 | length 15
  Top Layer w0.15: v1(8.15,19.05) 8.2,19 J2.16 ; v1(18.65,15.45) 19.135,15.45 19.25,15.565 U2.39
  Bottom Layer w0.15: v1(8.15,19.05) 8.2,19 13.074,19 15.2,19 18.65,15.55 v1(18.65,15.45)
CCEC: J3.13 U2.15 | length 27.7
  Top Layer w0.15: U2.15 22.5,23 23.05,23.55 23.85,23.55 26.05,25.75 32.75,25.75 34.75,23.75 34.75,17.5 31.75,14.5 J3.13
CCK_n: J3.12 U2.13 | length 25.9
  Top Layer w0.12: U2.13 21.749,21.901 23.075,21.901 26.475,25.301 32.125,25.301 34.301,23.125 34.301,21.5 34.301,18.475 31.15,15.324 31.15,15.15 31,15 J3.12
CCK_p: J3.10 U2.12 | length 24.5
  Top Layer w0.12: U2.12 21.749,21.599 23.199,21.599 26.6,25 32,25 34,23 34,21.375 34,18.6 31.4,16 J3.10
CD0_n: J3.3 U2.6 | length 24.7
  Top Layer w0.12: U2.6 21.749,18.401 23.823,18.401 24.549,18.401 ccw(c24.549,18.521) 24.634,18.605 24.38,18.86 cw(c24.65,19.129) 24.38,19.398 24.493,19.512 cw(c24.763,19.242) 25.032,19.512 26.139,18.405 ccw(c26.195,18.462) 26.252,18.405 26.365,18.518 ccw(c26.309,18.575) 26.365,18.631 25.266,19.73 cw(c25.536,20) 25.266,20.269 25.379,20.382 cw(c25.649,20.113) 25.918,20.382 27.288,19.013 ccw(c27.344,19.069) 27.401,19.013 27.514,19.126 ccw(c27.457,19.182) 27.514,19.239 26.15,20.603 cw(c26.419,20.873) 26.15,21.142 26.263,21.255 cw(c26.532,20.986) 26.802,21.255 27.194,20.863 ccw(c27.279,20.948) 27.363,20.863 27.801,21.301 28.484,21.301 31.625,21.301 32.051,20.875 32.051,20.125 31.775,19.849 31.379,19.849 31.03,19.5 J3.3
CD0_p: J3.1 U2.5 | length 23.7
  Top Layer w0.12: U2.5 21.749,18.099 24.124,18.099 24.549,18.099 ccw(c24.549,18.521) 24.847,18.818 24.593,19.072 cw(c24.65,19.129) 24.593,19.186 24.706,19.299 cw(c24.763,19.242) 24.819,19.299 25.926,18.192 ccw(c26.195,18.462) 26.465,18.192 26.578,18.305 ccw(c26.309,18.575) 26.578,18.844 25.479,19.943 cw(c25.536,20) 25.479,20.056 25.592,20.169 cw(c25.649,20.113) 25.705,20.169 27.075,18.8 ccw(c27.344,19.069) 27.614,18.8 27.727,18.913 ccw(c27.457,19.182) 27.727,19.452 26.363,20.816 cw(c26.419,20.873) 26.363,20.929 26.476,21.042 cw(c26.532,20.986) 26.589,21.042 26.98,20.651 ccw(c27.279,20.948) 27.576,20.65 27.926,21 28.785,21 30.165,21 31.5,21 31.75,20.75 31.75,20.25 31.651,20.151 31.379,20.151 31.03,20.5 J3.1
CD1_n: J3.6 U2.8 | length 24.4
  Top Layer w0.12: U2.8 21.749,19.401 22.823,19.401 23.383,19.401 ccw(c23.383,19.521) 23.468,19.605 23.352,19.721 cw(c23.64,20.008) 23.352,20.295 23.501,20.443 cw(c23.788,20.156) 24.075,20.443 24.28,20.239 ccw(c24.354,20.313) 24.428,20.239 24.577,20.387 ccw(c24.503,20.462) 24.577,20.536 24.372,20.74 cw(c24.659,21.027) 24.372,21.315 24.521,21.463 cw(c24.808,21.176) 25.095,21.463 25.305,21.253 ccw(c25.379,21.328) 25.453,21.253 25.602,21.402 ccw(c25.528,21.476) 25.602,21.55 25.392,21.76 cw(c25.679,22.047) 25.392,22.334 25.54,22.483 cw(c25.828,22.196) 26.115,22.483 26.525,22.073 ccw(c26.599,22.147) 26.673,22.073 26.822,22.222 ccw(c26.747,22.296) 26.822,22.37 26.412,22.78 cw(c26.699,23.067) 26.412,23.354 26.56,23.503 cw(c26.847,23.215) 27.134,23.503 28.551,22.086 ccw(c28.636,22.171) 28.636,22.051 29.555,22.051 31.875,22.051 32.801,21.125 32.801,19.125 32.025,18.349 31.379,18.349 31.03,18 J3.6
CD1_p: J3.4 U2.7 | length 23.4
  Top Layer w0.12: U2.7 21.749,19.099 23.124,19.099 23.383,19.099 ccw(c23.383,19.521) 23.681,19.818 23.565,19.934 cw(c23.64,20.008) 23.565,20.082 23.714,20.23 cw(c23.788,20.156) 23.862,20.23 24.067,20.026 ccw(c24.354,20.313) 24.641,20.026 24.79,20.174 ccw(c24.503,20.462) 24.79,20.749 24.585,20.953 cw(c24.659,21.027) 24.585,21.102 24.734,21.25 cw(c24.808,21.176) 24.882,21.25 25.092,21.04 ccw(c25.379,21.328) 25.666,21.04 25.815,21.189 ccw(c25.528,21.476) 25.815,21.763 25.605,21.973 cw(c25.679,22.047) 25.605,22.121 25.753,22.27 cw(c25.828,22.196) 25.902,22.27 26.312,21.86 ccw(c26.599,22.147) 26.886,21.86 27.034,22.009 ccw(c26.747,22.296) 27.034,22.583 26.625,22.993 cw(c26.699,23.067) 26.625,23.141 26.773,23.29 cw(c26.847,23.215) 26.922,23.29 28.337,21.874 ccw(c28.636,22.171) 28.636,21.75 29.856,21.75 31.75,21.75 32.5,21 32.5,19.25 31.901,18.651 31.379,18.651 31.03,19 J3.4
CD2_n: J3.9 U2.11 | length 25.5
  Top Layer w0.12: U2.11 21.749,20.901 23.151,20.901 26.801,24.551 27.25,24.551 cw(c27.25,24.2) 27.601,24.2 27.601,23.899 ccw(c27.7,23.899) 27.7,23.8 27.9,23.8 ccw(c27.9,23.9) 28,23.9 28,24.201 cw(c28.4,24.201) 28.4,24.601 31.925,24.601 32.601,23.925 32.601,23.503 32.601,23.293 ccw(c32.721,23.293) 32.721,23.173 33.127,23.173 cw(c33.127,22.767) 33.533,22.767 33.533,22.557 cw(c33.127,22.557) 33.127,22.151 32.939,22.151 ccw(c32.939,22.031) 32.854,21.946 33.551,21.249 33.551,21.204 33.551,18.625 31.775,16.849 31.379,16.849 31.03,16.5 J3.9
CD2_p: J3.7 U2.10 | length 24.5
  Top Layer w0.12: U2.10 21.749,20.599 23.275,20.599 26.926,24.25 27.25,24.25 cw(c27.25,24.2) 27.3,24.2 27.3,23.899 ccw(c27.7,23.899) 27.7,23.499 27.9,23.499 ccw(c27.9,23.9) 28.301,23.9 28.301,24.201 cw(c28.4,24.201) 28.4,24.3 31.8,24.3 32.3,23.8 32.3,23.503 32.3,23.293 ccw(c32.721,23.293) 32.721,22.872 33.127,22.872 cw(c33.127,22.767) 33.232,22.767 33.232,22.557 cw(c33.127,22.557) 33.127,22.452 32.939,22.452 ccw(c32.939,22.031) 32.642,21.732 33.17,21.204 33.25,21.124 33.25,18.75 31.651,17.151 31.379,17.151 31.03,17.5 J3.7
CHPD: J3.19 U2.14 | length 17.6
  Top Layer w0.15: J3.19 31.3,11.5 v1(31.35,11.55)
  Top Layer w0.2: U2.14 v1(22.5,22.5)
  Bottom Layer w0.15: v1(22.5,22.5) 22.5,19.7 30.65,11.55 v1(31.35,11.55)
CSCL: J3.15 U2.3 | length 19.9
  Top Layer w0.15: U2.3 25,17 26.3,15.7 26.3,12.2 26.9,11.6 27.65,11.6 28.5,10.75 31.5,10.75 32.25,11.5 32.25,13 31.75,13.5 J3.15
CSDA: J3.16 U2.4 | length 10.9
  Top Layer w0.15: U2.4 25.25,17.5 27.5,15.25 27.5,13.5 28,13 J3.16
GND: ANT1.2 C1.1 C2.2 C3.1 C4.2 C5.1 C6.2 C7.1 C8.2 C9.1 C10.2 C11.1 C12.1 C13.1 C14.2 C15.2 C16.2 C17.1 C18.2 D1.1 D2.2 J1.2 J1.5 J1.8 J1.11 J1.17 J1.M J2.2 J2.5 J2.8 J2.11 J2.17 J2.M J3.2 J3.5 J3.8 J3.11 J3.17 J3.M J4.A1B12 J4.B1A12 J4.M1 R4.1 R5.1 TP4.1 U1.33 U2.43 U3.1 Y1.2 Y1.4 | length 49.2
  Top Layer w0.2: v2(1.73,27.198) 1.732,27.2 D1.1 ; v1(8.72,12) J2.2 ; v1(8.72,13.5) J2.5 ; v1(8.72,15) J2.8 ; v1(8.72,16.5) J2.11 ; v1(8.72,19.5) J2.17 ; v1@9.45,30.828 R4.1 ; v1(9.449,35.827) R5.1 ; v1(16.305,8.011) 16.411,8.011 16.6,8.2 16.6,8.9 16.5,9 J1.17 ; v1(19.5,8.72) J1.11 ; v1(21,8.72) J1.8 ; v1(22.5,8.72) J1.5 ; v1(24,8.72) J1.2 ; v1(28,12.5) J3.17 ; v1(28,15.5) J3.11 ; v1(28,17) J3.8 ; v1(28,18.5) J3.5 ; v1(28,20) J3.2
  Top Layer w0.5: D2.2 v1(9.75,33.95) ; v1(18.62,31) C3.1 ; v1(18.62,32.2) C8.2 ; C6.2 v1(18.75,38.35) ; v1(18.9,39.7) C16.2 ; C1.1 v1(24.75,15.75) ; C14.2 v1(26.4,40.2) ; C15.2 v1(26.4,43.2) ; C4.2 26.88,38.48 v1(26.9,38.5) ; C7.1@27.202,38.5 v1(28.1,38.5) 29.9,38.5 30.77,37.63 C12.1
  Top Layer w0.7: J4.M1@6.29,29.375 6.86,29.945 J4.B1A12 ; J4.M1@6.29,38.025 6.29,37.47 J4.A1B12 ; C18.2@22.5,39.7 22.52,39.72 C17.1 C5.1 ; C2.2 v1(23.3,32.2)
  other v1: 15.75,2.5 18.75,2.5 21.75,2.5 24.75,2.5 30.75,2.5 33.75,2.5 5.25,5.5 7.3,5.5 17.25,5.5 20.25,5.5 23.25,5.5 26.25,5.5 29.25,5.5 32.25,5.5 35.25,5.5 19.65,6.85 16.2,6.9 0.75,8.5 21.75,8.5 33.75,8.5 2.25,11.5 5.25,11.5 14.25,11.5 35.25,11.5 38.25,11.5 31.45,12.25 0.75,14.5 3.75,14.5 33.75,14.5 36.75,14.5 17.902,15.438 2.25,17.5 5.25,17.5 26.25,17.5 38.25,17.5 8.122,18.05 0.75,20.5 3.75,20.5 36.75,20.5 23.15,22.85 21.95,26.35 0.75,26.5 6.75,26.5 9.75,26.5 12.75,26.5 24.75,26.5 27.75,26.5 33.75,26.5 36.75,26.5 29.3,28.7 30.2,28.7 8.25,29.5 11.25,29.5 14.25,29.5 26.25,29.5 35.25,29.5 9.449,30.827 30.1,31.8 0.75,32.5 3.75,32.5 9.75,32.5 12.75,32.5 24.75,32.5 33.75,32.5 36.75,32.5 30.1,32.7 31,32.7 31.9,32.7 32.8,32.7 16.25,32.75 15.7,33.513 37.627,33.871 35.34,33.888 2.25,35.5 14.25,35.5 17.25,35.95 39.318,36.076 29.3,37.8 35.316,38.325 37.563,38.323 0.75,38.5 12.75,38.5 30.75,38.5 33.75,38.5 22.5,40.3 8.25,41.5 11.25,41.5 14.25,41.5 22.5,41.5 26.25,41.5 29.25,41.5 32.25,41.5 26.935,44.55
  other v3: 19.45,16.7 20.55,16.7 19.45,17.8 20.55,17.8 19.45,18.9 20.55,18.9 19.45,20 20.55,20 19.45,21.1 20.55,21.1 19.45,22.2 20.55,22.2 19.45,23.3 20.55,23.3 21.1,34.55 22.5,34.55 23.9,34.55 21.1,35.95 22.5,35.95 23.9,35.95 21.1,37.35 22.5,37.35 23.9,37.35
MCU_ANT: C14.1 L1.1 U1.1 | length 3
  Top Layer w0.156: U1.1 24.25,38.646 cw(c25.104,38.646) 24.5,39.25 ccw(c23.848,39.902) 24.77,39.902 C14.1 24.77,41.202 ccw(c24.702,41.202) L1.1
MCU_EN: U1.14 U2.2 | length 27.1
  Top Layer w0.15: v1(17,32.7) 17,34.2 18,35.2 U1.14 ; U2.2 v1(24.5,16.5)
  Bottom Layer w0.15: v1(17,32.7) 17,28.7 21.7,24 21.7,19.3 v1(24.5,16.5)
MCU_HSEIN: R2.1 U1.30 | length 1.5
  Top Layer w0.2: U1.30 25.65,36.7 25.85,36.5 R2.1
MCU_HSEOUT: C13.2 U1.29 Y1.1 | length 14.9
  Top Layer w0.2: U1.29 25.3,36.2 25.75,35.75 35.13,35.75 C13.2 35.82,36 38.25,36 38.45,35.8 Y1.1
MCU_RX: TP2.1 U1.27 | length 4.3
  Top Layer w0.15: U1.27 25.31,35.2 25.46,35.05 25.95,35.05 TP2.1
MCU_SEL1: U1.6 U2.16 | length 30.2
  Top Layer w0.15: v1(15.9,34.226) 15.9,39.7 17.65,41.45 20.75,41.45 21,41.2 21,40.2 21.75,39.45 U1.6 ; U2.16 22.25,23.5 22.45,23.7 22.45,25.3 v1(22.45,25.75)
  Bottom Layer w0.15: v1(15.9,34.226) 18.574,34.226 22.45,30.35 v1(22.45,25.75)
MCU_SEL2: U1.8 U2.17 | length 23.3
  Top Layer w0.15: v1(16.45,33.463) 16.45,38.2 17.39,39.14 20.56,39.14 20.75,38.95 U1.8 ; v1(21.5,25.75) 21.5,25.25 21.1,24.85 21.1,24.15 21.25,24 U2.17
  Bottom Layer w0.15: v1(16.45,33.463) 18.237,33.463 21.05,30.65 21.05,26.2 v1(21.5,25.75)
MCU_TX: TP1.1 U1.28 | length 3.8
  Top Layer w0.15: U1.28 25.305,35.7 25.605,35.4 26.1,35.4 26.95,34.55 TP1.1
NetC2_1: C2.1 U1.18 | length 1.5
  Top Layer w0.25: 21.25,32.95 U1.18
  Top Layer w0.385: 21.25,32.95 21.31,32.89
  Top Layer w0.5: 21.31,32.89 21.62,32.58 C2.1
NetC12_2: C12.2 R2.2 Y1.3 | length 9.8
  Top Layer w0.2: R2.2 35.18,36.5 35.88,37.2 Y1.3
NetD1_2: D1.2 R1.1 | length 1.4
  Top Layer w0.2: D1.2 R1.1
NetD2_1: D2.1 J4.A7 J4.B7 | length 4.6
  Top Layer w0.12: J4.A7 6.25,33.45 6,33.7 6,34.2 6.25,34.45 J4.B7 7.75,34.45 8.2,34.9 D2.1
NetD2_3: D2.3 J4.A6 J4.B6 | length 3.7
  Top Layer w0.12: J4.B6 7.5,32.95 7.75,33.2 ; J4.A6 7.5,33.95 7.75,33.7 7.75,33.2 ; D2.3 8.825,32.95 8,32.95 7.75,33.2
NetJ1_18: J1.18 R6.2 | length 7.7
  Top Layer w0.2: R6.2 v1(11.3,7.2) ; v1(16,8.7) J1.18
  Bottom Layer w0.2: v1(11.3,7.2) 13.4,7.2 14.9,8.7 v1(16,8.7)
NetJ2_18: J2.18 R7.2 | length 9.8
  Top Layer w0.2: v1@8.7,20.2 8.9,20 J2.18 ; v1(11.148,25.545) 11.15,25.543 R7.2
  Bottom Layer w0.2: v1(8.6,20.3) 9.5,20.3 11.7,22.5 11.7,24.993 v1(11.148,25.545)
NetJ3_18: J3.18 R8.2 | length 3.3
  Top Layer w0.2: R8.2 27,12.2 27.2,12 27.8,12 27.996,11.804 28.1,11.804 28.296,12 J3.18
NetJ4_A5: J4.A5 R5.2 | length 2.9
  Top Layer w0.2: J4.A5 7.75,34.95 8,35.2 8,36.2 8.25,36.45 R5.2
NetJ4_B5: J4.B5 R4.2 | length 1.9
  Top Layer w0.2: J4.B5 7.75,31.95 8.25,31.45 R4.2
R\S\T\: C16.1 R3.1 U1.7 | length 2.8
  Top Layer w0.15: R3.1 20.45,39.73 C16.1 20.75,39.7 21.225,39.225 21.225,38.725 21.25,38.7 U1.7
USB_D_N: D2.6 U1.25 | length 23
  Top Layer w0.12: D2.6 12.35,34.9 12.5,34.75 12.5,33.75 12.699,33.551 13.699,33.551 ; 13.75,33.5 13.699,33.551 ; U1.25 25.024,34.299 25.75,34.299 26,34.049 26,30.75 24.75,29.5 16.5,29.5 14.25,31.75 14.25,33 13.699,33.551
USB_D_P: D2.4 U1.26 | length 22.9
  Top Layer w0.12: D2.4 12.25,33 12.5,33.25 13.574,33.25 13.949,32.875 13.949,31.625 16.375,29.199 24.875,29.199 26.301,30.625 26.301,34.174 25.875,34.601 25.024,34.601 U1.26
pads on no net: H1.1 H2.1 H3.1 H4.1 J1.14 J2.14 J3.14 J4.A8 J4.B8 J4.H U1.4 U1.5 U1.9 U1.10 U1.12 U1.13 U1.16 U1.19 U1.20 U1.21 U1.22 U1.23 U1.24 U2.9 U2.30
copper on no net:
  other v2: 2.75,0.85 37.25,0.85 1.406,1.406 4.094,1.406 35.906,1.406 38.593,1.406 0.85,2.75 4.65,2.75 35.35,2.75 39.15,2.75 1.406,4.094 4.094,4.094 35.906,4.094 38.593,4.094 2.75,4.65 37.25,4.65 2.75,39.8 37.25,39.8 1.406,40.357 4.094,40.357 35.906,40.356 38.594,40.356 0.85,41.7 4.65,41.7 35.35,41.7 39.15,41.7 1.406,43.044 4.094,43.044 35.906,43.044 38.594,43.044 2.75,43.6 37.25,43.6

## Polygon pours and split planes (outlines as drawn)
+3V3 on Top Layer "NONET_L-01_P-001" (solid, remove dead copper, pour order 8): 0,0 40,0 40,44.8 0,44.8 0,43.75
GND on Top Layer "GND_L01_P002" (solid, remove dead copper, pour order 2): 34.35,34.1 34.35,38.1 cw(c35.1,38.1) 35.1,38.85 39.1,38.85 cw(c39.1,38.1) 39.85,38.1 39.85,34.1 cw(c39.1,34.1) 39.1,33.35 35.1,33.35 cw(c35.1,34.1)
GND on Layer 1 "GND_L02_P005" (solid, remove dead copper, pour order 5): 0,0 40,0 40,44.8 0,44.8 0,43.75
GND on Layer 2 "GND_L03_P006" (solid, remove dead copper, pour order 6): 0,0 40,0 40,44.8 0,44.8 0,43.75
+3V3 on Bottom Layer "+3V3_L04_P007" (solid, remove dead copper, pour order 7): -0.075,-0.215 39.925,-0.215 39.925,44.585 -0.075,44.585 -0.075,43.535

## Keep-outs
Top Layer:
  lines w0.1: 12.5,44.8 12.5,43.8 27.8,43.8 27.8,44.8
Layer 2:
  region: 34.35,38.1 cw(c35.1,38.1) 35.1,38.85 39.1,38.85 cw(c39.1,38.1) 39.85,38.1 39.85,34.1 cw(c39.1,34.1) 39.1,33.35 35.1,33.35 cw(c35.1,34.1) 34.35,34.1
Bottom Layer:
  region: 34.35,38.1 cw(c35.1,38.1) 35.1,38.85 39.1,38.85 cw(c39.1,38.1) 39.85,38.1 39.85,34.1 cw(c39.1,34.1) 39.1,33.35 35.1,33.35 cw(c35.1,34.1) 34.35,34.1
  lines w0.1: 12.5,44.8 12.5,43.8 27.8,43.8 27.8,44.8
Keep-Out Layer:
  lines w0.2: 34.35,34.1 ccw(c35.1,34.1) 35.1,33.35 39.1,33.35 ccw(c39.1,34.1) 39.85,34.1 39.85,38.1 ccw(c39.1,38.1) 39.1,38.85 35.1,38.85 ccw(c35.1,38.1) 34.35,38.1 34.35,35.85 34.35,34.1

## Other copper
Top Layer:
  region net +3V3: 6.327,1.45 ccw(c6.475,1.45) 6.622,1.45 6.622,1.747 cw(c6.696,1.747) 6.77,1.747 6.77,1.45 ccw(c6.917,1.45) 7.065,1.45 7.065,1.747 cw(c7.138,1.747) 7.212,1.747 7.212,1.45 ccw(c7.359,1.45) 7.507,1.45 7.507,1.747 cw(c7.581,1.747) 7.654,1.747 7.654,1.45 ccw(c7.802,1.45) 7.949,1.45 7.949,1.498 cw(c8.023,1.498) 8.023,1.571 8.302,1.571 8.317,1.571 cw(c8.302,0.871) 8.797,1.366 8.946,1.218 ccw(c9.493,1.765) 9.493,0.991 11.51,0.991 ccw(c11.51,1.028) 11.547,1.028 ccw(c11.51,1.028) 11.51,1.065 9.493,1.065 cw(c9.493,1.765) 8.998,1.27 8.85,1.419 ccw(c8.302,0.871) 8.318,1.645 8.302,1.645 8.023,1.645 ccw(c8.023,1.498) 7.875,1.498 7.875,1.45 cw(c7.802,1.45) 7.728,1.45 7.728,1.747 ccw(c7.581,1.747) 7.433,1.747 7.433,1.45 cw(c7.359,1.45) 7.286,1.45 7.286,1.747 ccw(c7.138,1.747) 6.991,1.747 6.991,1.45 cw(c6.917,1.45) 6.844,1.45 6.844,1.747 ccw(c6.696,1.747) 6.548,1.747 6.548,1.45 cw(c6.475,1.45) 6.401,1.45 6.401,1.747 ccw(c6.254,1.747) 6.106,1.747 6.106,1.719 cw(c6.033,1.719) 6.033,1.645 5.706,1.645 ccw(c5.706,1.608) 5.706,1.571 6.033,1.571 ccw(c6.033,1.719) 6.18,1.719 6.18,1.747 cw(c6.254,1.747) 6.327,1.747
  region net +3V3: 5.706,2.806 8.883,2.806 ccw(c8.883,3.506) 9.378,3.011 9.768,3.402 9.769,3.402 ccw(c9.716,3.454) 9.79,3.454 ccw(c9.716,3.454) 9.769,3.506 9.768,3.506 9.404,3.871 9.403,3.871 cw(c9.508,3.975) 9.404,4.08 cw(c9.508,3.975) 9.612,4.08 10.498,3.193 10.499,3.193 ccw(c10.55,3.245) 10.602,3.193 10.603,3.194 ccw(c10.55,3.245) 10.624,3.245 ccw(c10.55,3.245) 10.603,3.297 10.602,3.298 9.798,4.102 9.797,4.103 cw(c9.902,4.207) 9.798,4.311 cw(c9.902,4.207) 10.006,4.311 10.811,3.506 ccw(c10.863,3.558) 10.915,3.506 ccw(c10.863,3.558) 10.937,3.558 ccw(c10.863,3.558) 10.915,3.61 10.81,3.715 cw(c10.915,3.82) 10.915,3.967 11.51,3.967 cw(c11.51,3.93) 11.547,3.93 cw(c11.51,3.93) 11.51,3.893 10.915,3.893 ccw(c10.915,3.82) 10.862,3.768 10.863,3.768 10.967,3.663 10.968,3.662 cw(c10.863,3.558) 11.011,3.558 cw(c10.863,3.558) 10.967,3.454 cw(c10.863,3.558) 10.759,3.454 9.954,4.259 ccw(c9.902,4.207) 9.85,4.259 ccw(c9.902,4.207) 9.85,4.155 10.655,3.35 cw(c10.55,3.245) 10.698,3.245 cw(c10.55,3.245) 10.655,3.141 cw(c10.55,3.245) 10.446,3.141 9.56,4.027 ccw(c9.508,3.975) 9.456,4.027 ccw(c9.508,3.975) 9.456,3.923 9.821,3.558 cw(c9.716,3.454) 9.864,3.454 cw(c9.716,3.454) 9.821,3.35 9.43,2.959 cw(c8.883,3.506) 8.883,2.732 5.706,2.732 cw(c5.706,2.769)
  region net +3V3: 5.706,3.313 7.439,3.313 ccw(c7.439,4.087) 7.478,3.314 7.491,3.317 7.565,3.35 ccw(c7.476,3.55) 7.695,3.55 7.695,4.564 cw(c7.84,4.564) 7.84,4.709 cw(c7.84,4.564) 7.985,4.564 7.985,3.29 ccw(c8.204,3.29) 8.204,3.071 ccw(c8.204,3.29) 8.423,3.29 8.423,4.564 cw(c8.568,4.564) 8.568,4.709 cw(c8.568,4.564) 8.713,4.564 8.713,3.29 ccw(c8.932,3.29) 8.932,3.071 ccw(c8.932,3.29) 9.151,3.29 9.151,4.329 cw(c9.296,4.329) 9.296,4.474 11.51,4.474 ccw(c11.51,4.511) 11.547,4.511 ccw(c11.51,4.511) 11.51,4.548 9.296,4.548 ccw(c9.296,4.329) 9.077,4.329 9.077,3.29 cw(c8.932,3.29) 8.932,3.145 cw(c8.932,3.29) 8.787,3.29 8.787,4.564 ccw(c8.568,4.564) 8.568,4.783 ccw(c8.568,4.564) 8.349,4.564 8.349,3.29 cw(c8.204,3.29) 8.204,3.145 cw(c8.204,3.29) 8.059,3.29 8.059,4.564 ccw(c7.84,4.564) 7.84,4.783 ccw(c7.84,4.564) 7.621,4.564 7.621,3.55 cw(c7.476,3.55) 7.535,3.417 7.467,3.387 7.439,3.387 5.706,3.387 ccw(c5.706,3.35)
  region net +3V3: 8.368,2.036 ccw(c8.515,2.036) 8.663,2.036 8.663,2.511 cw(c8.737,2.511) 8.81,2.511 8.81,2.036 ccw(c8.958,2.036) 9.105,2.036 9.105,2.53 cw(c9.179,2.53) 9.252,2.53 9.252,2.036 ccw(c9.4,2.036) 9.548,2.036 9.548,2.773 cw(c9.621,2.773) 9.695,2.773 9.695,2.036 ccw(c9.842,2.036) 9.99,2.036 9.99,3.146 cw(c10.063,3.146) 10.137,3.146 10.137,2.036 ccw(c10.285,2.036) 10.432,2.036 10.432,2.877 cw(c10.506,2.877) 10.579,2.877 10.579,2.036 ccw(c10.727,2.036) 10.874,2.036 10.874,3.19 cw(c10.948,3.19) 11.022,3.19 11.022,2.299 ccw(c11.169,2.299) 11.169,2.152 11.51,2.152 ccw(c11.51,2.189) 11.547,2.189 ccw(c11.51,2.189) 11.51,2.226 11.169,2.226 cw(c11.169,2.299) 11.096,2.299 11.096,3.19 ccw(c10.948,3.19) 10.8,3.19 10.8,2.036 cw(c10.727,2.036) 10.653,2.036 10.653,2.877 ccw(c10.506,2.877) 10.358,2.877 10.358,2.036 cw(c10.285,2.036) 10.211,2.036 10.211,3.146 ccw(c10.063,3.146) 9.916,3.146 9.916,2.036 cw(c9.842,2.036) 9.769,2.036 9.769,2.773 ccw(c9.621,2.773) 9.474,2.773 9.474,2.036 cw(c9.4,2.036) 9.326,2.036 9.326,2.53 ccw(c9.179,2.53) 9.031,2.53 9.031,2.036 cw(c8.958,2.036) 8.884,2.036 8.884,2.511 ccw(c8.737,2.511) 8.589,2.511 8.589,2.036 cw(c8.515,2.036) 8.442,2.036 8.442,2.511 ccw(c8.294,2.511) 8.147,2.511 8.147,2.299 cw(c8.073,2.299) 8.073,2.226 5.706,2.226 ccw(c5.706,2.189) 5.706,2.152 8.073,2.152 ccw(c8.073,2.299) 8.221,2.299 8.221,2.511 cw(c8.294,2.511) 8.368,2.511
  region net GND: 30.4,27.6 ccw(c30.4,27.8) 30.6,27.8 30.6,28.8 ccw(c30.4,28.8) 30.4,29 29.1,29 ccw(c29.1,28.8) 28.9,28.8 28.9,27.8 ccw(c29.1,27.8) 29.1,27.6
  region net GND: 33.2,30.6 ccw(c33.2,30.8) 33.4,30.8 33.4,32.9 ccw(c33.2,32.9) 33.2,33.1 29.9,33.1 ccw(c29.9,32.9) 29.7,32.9 29.7,30.8 ccw(c29.9,30.8) 29.9,30.6

## Silkscreen, mask and mechanical layers (free items; w line width, h text height)
Top Overlay:
  drawing of 4 lines, arcs and shapes, not listed
  text ".PCB_Revision" at 6.1,42.333 h0.8
Mechanical 1:
  lines w0.2: 40,41.7 ccw(c40,41.7) 40,41.7 ; 40,41.7 ccw(c37.25,41.7) 37.25,44.45 29.02,44.45 cw(c29.02,45.72) 27.75,45.72 27.75,49.6 ccw(c27.35,49.6) 27.35,50 12.85,50 ccw(c12.85,49.6) 12.45,49.6 12.45,45.72 cw(c11.18,45.72) 11.18,44.45 2.75,44.45 ccw(c2.75,41.7) 0,41.7 0,2.75 ccw(c2.75,2.75) 2.75,0 37.25,0 ccw(c37.25,2.75) 40,2.75 40,41.7 ; 35.75,44.45 ccw(c35.75,44.45) 35.75,44.45
Mechanical 13:
  lines w0.254: -13.75,5 -13.75,27 -0.75,27 -0.75,5 -13.75,5 ; -7.75,27.45 -1,27.45 -1,39.95 -7.75,39.95 -7.75,27.45 ; 9,-13.75 31,-13.75 31,-0.75 9,-0.75 9,-13.75 ; 40.75,5 40.75,27 53.75,27 53.75,5 40.75,5

## Text inside footprints (layer, text, board x,y; h text height)
J4: Mechanical 14 "PCB edge" at 0.267,28.266 h0.5 r270